# Allegro board hiveboard_v0_3.brd
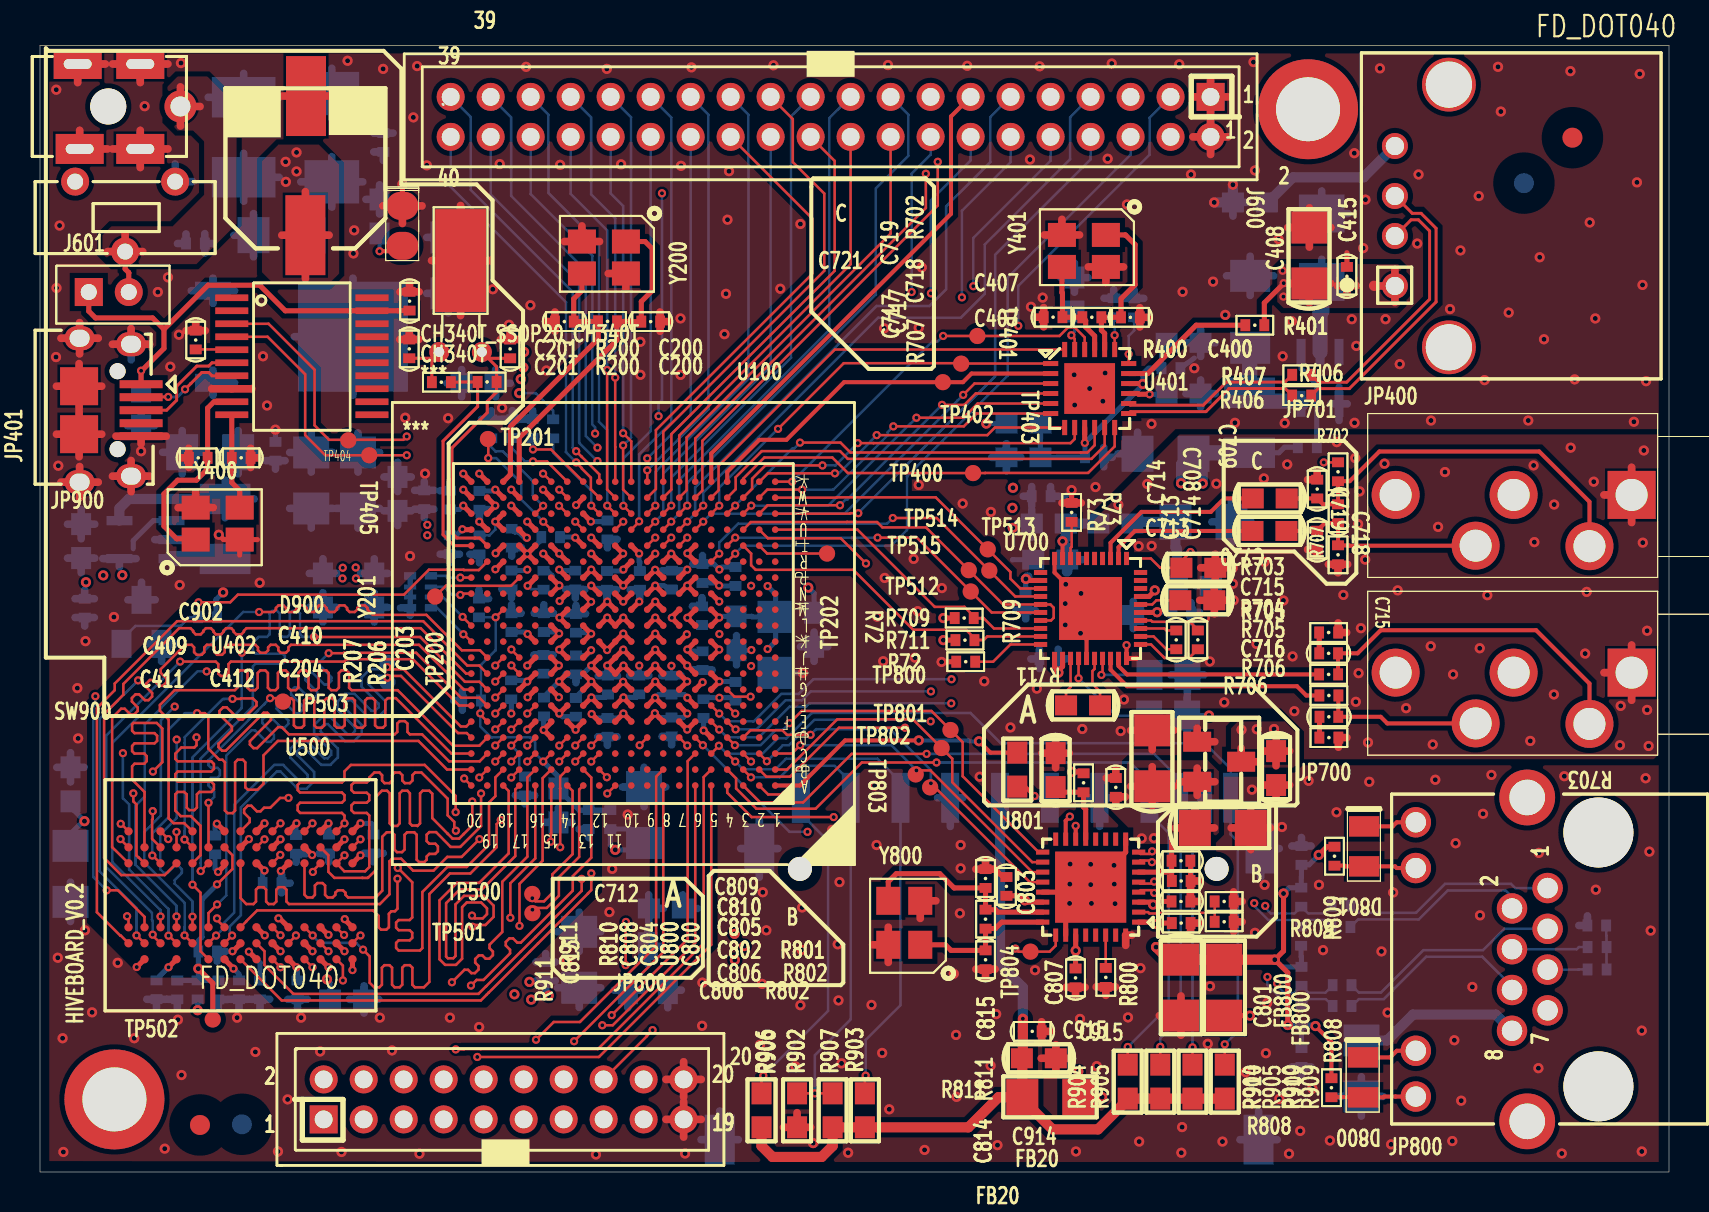
[diagram p0: board, top side]
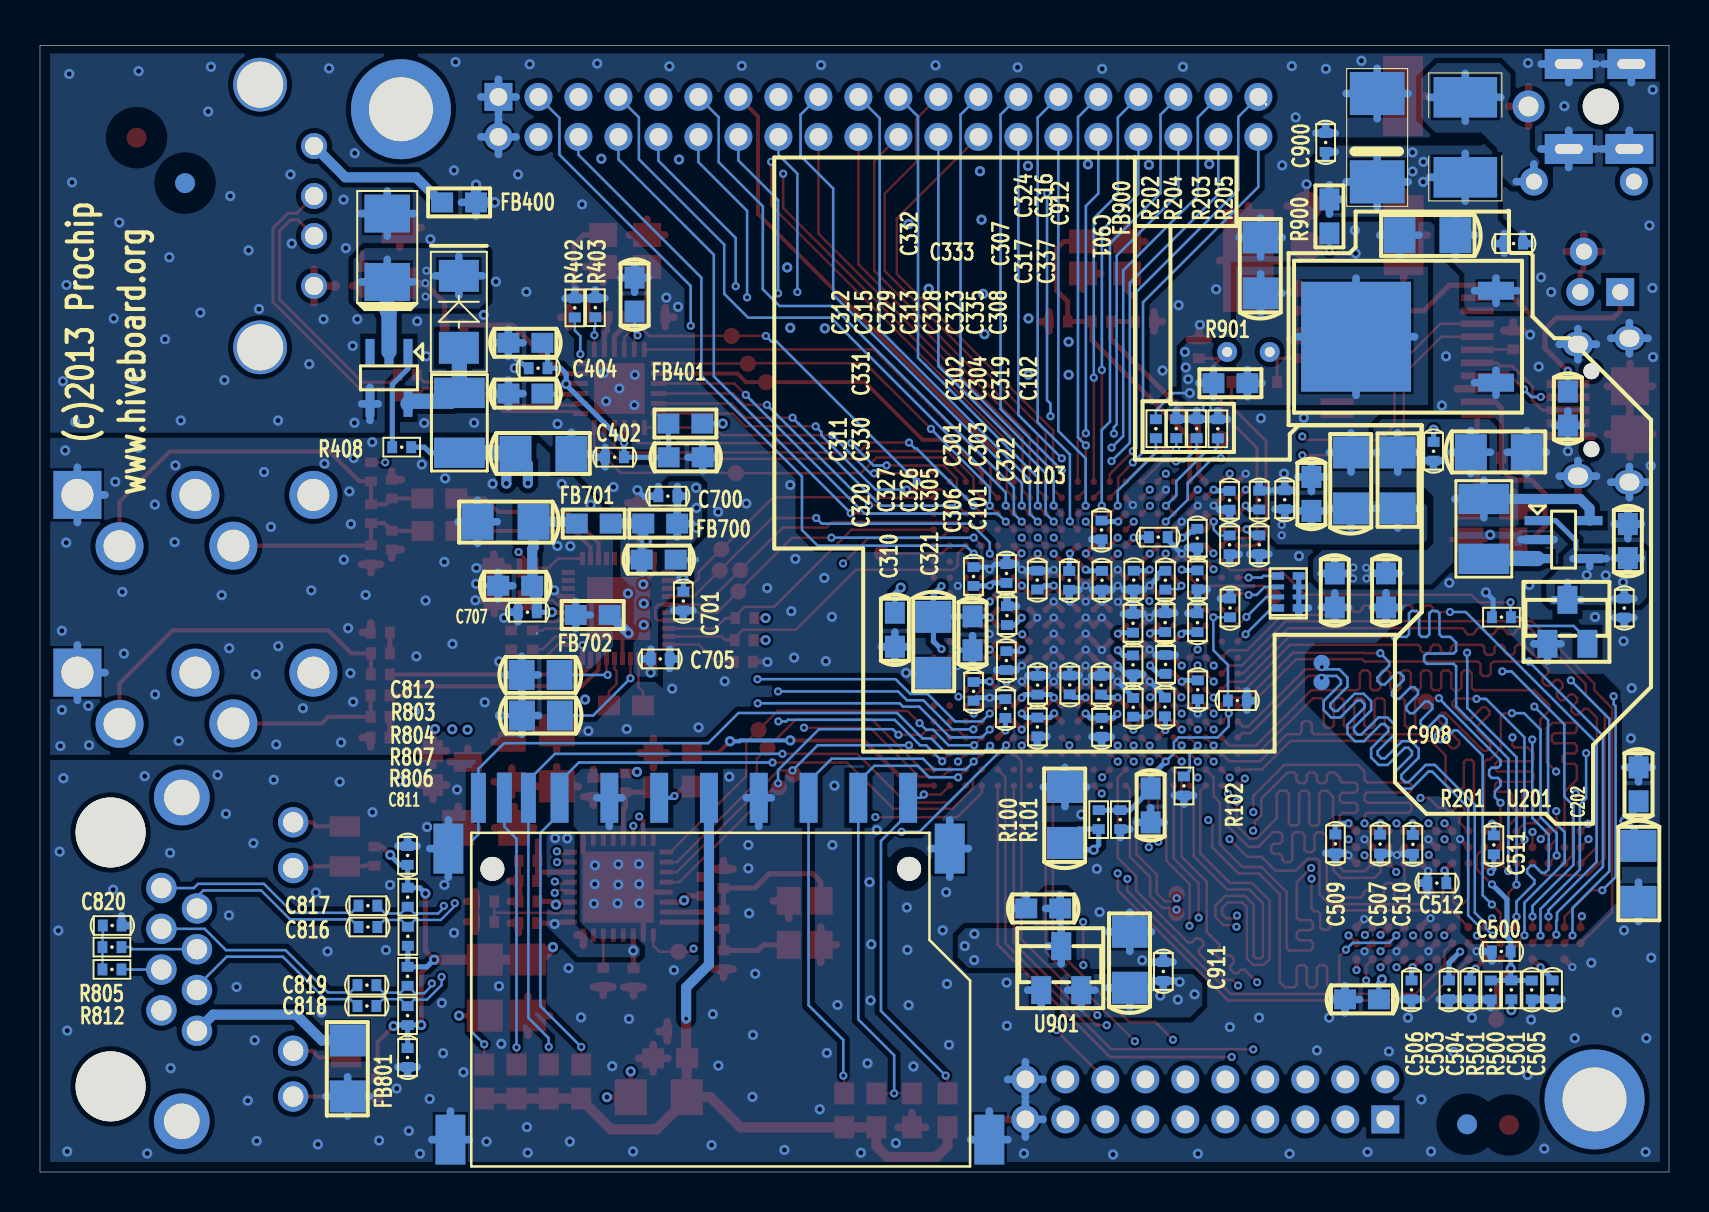
[diagram p1: board, bottom side, seen from below]

Outline 81.46 x 56.36 mm; copper layers: TOP, GND, INT1, VCC, GND1, BOTTOM. Coordinates in mm from the lower left corner of the outline.
Outline path: 20.17,53.39 20.14,53.42 ; 0,56.36 0,0 81.46,0 81.46,56.36 81.46,56.36 0,56.36

## Design rules (mm)
net group DP1: nets N27185592 N27185613
net group MATCH_LENTH_DQS0_DQS1: nets DDR_DQS1 DDR_DQS_B_1
net group USB: nets USB_DM USB_DP
net group MATCH_LENTH_ADD_ADD: nets DDR_BA0 DDR_BA1 DDR_BA2 DDR_CKE DDR_NCAS DDR_NCS DDR_NRAS DDR_NWE DDR_ODT T_DDR_A0 T_DDR_A1 T_DDR_A2 T_DDR_A3 T_DDR_A4 T_DDR_A5 T_DDR_A6 T_DDR_A7 T_DDR_A8 T_DDR_A9 T_DDR_A10 T_DDR_A11 T_DDR_A12 T_DDR_A13 T_DDR_A14
net group MATCH_LENTH_DQS0: nets DDR_CK DDR_NCK ETH_RXN ETH_RXN_RJ45 ETH_RXP ETH_RXP_RJ45 ETH_TXN ETH_TXN_RJ45 ETH_TXP ETH_TXP_RJ45
net group MATCH_LENTH_DQS0_DQS0: nets DDR_DM0 DDR_DQS0 DDR_DQS_B_0 T_DDR_DQ0 T_DDR_DQ1 T_DDR_DQ2 T_DDR_DQ3 T_DDR_DQ4 T_DDR_DQ5 T_DDR_DQ6 T_DDR_DQ7
net group MATCH_LENTH_DQS1_DQS1: nets DDR_DM1 T_DDR_DQ8 T_DDR_DQ9 T_DDR_DQ10 T_DDR_DQ11 T_DDR_DQ12 T_DDR_DQ13 T_DDR_DQ14 T_DDR_DQ15
nets with their own width: min track width 0.004; nets N27191334 N27191336

## Placement (name value [footprint] x y rotation side)
C100  1uF  [SC0603]  1.53 19.39 90 bottom
C101  0.1uF  [SC0402]  25.21 23.26 90 bottom
C102  0.1uF  [SC0402]  21.95 28.21 90 bottom
C103  0.01uF  [SC0402]  21.59 23.58 180 bottom
C104  1uF  [SC0603]  25.92 18.34 270 bottom
C200  20pF  [SC0402]  30.54 42.54 0 top
C201  20pF  [SC0402]  26.22 42.54 180 top
C202  0.1uF  [SC0402]  2.24 28.21 270 bottom
C203  15pF  [SC0402]  23.51 41.17 90 top
C204  15pF  [SC0402]  18.47 41.17 90 top
C300  10uF  [SC1206]  1.53 14.91 270 bottom
C301  0.1uF  [SC0402]  26.8 25.37 90 bottom
C302  0.1uF  [SC0402]  26.8 27.45 270 bottom
C303  0.1uF  [SC0402]  25.18 25.39 270 bottom
C304  0.1uF  [SC0402]  25.2 27.48 270 bottom
C305  0.01uF  [SC0402]  28.4 24.35 270 bottom
C306  0.01uF  [SC0402]  26.79 23.25 270 bottom
C307  0.01uF  [SC0402]  23.59 31.7 270 bottom
C308  0.1uF  [SC0402]  23.58 29.62 270 bottom
C309  1uF  [SC0603]  14.15 29.1 90 bottom
C310  0.1uF  [SC0402]  31.59 22.26 90 bottom
C311  0.1uF  [SC0402]  34.78 24.04 90 bottom
C312  0.1uF  [SC0402]  34.78 29.79 270 bottom
C313  0.01uF  [SC0402]  29.99 29.6 90 bottom
C314  10uF  [SC1206]  36.79 26.37 270 bottom
C315  0.01uF  [SC0402]  33.13 29.94 270 bottom
C316  0.01uF  [SC0402]  20.49 33.61 90 bottom
C317  0.01uF  [SC0402]  21.98 31.37 270 bottom
C318  1uF  [SC0603]  34.83 26.95 90 bottom
C319  0.1uF  [SC0402]  23.58 27.48 270 bottom
C320  0.1uF  [SC0402]  33.19 23.18 270 bottom
C321  0.01uF  [SC0402]  28.38 22.24 90 bottom
C322  0.01uF  [SC0402]  23.57 24.12 90 bottom
C323  0.1uF  [SC0402]  26.77 29.61 270 bottom
C324  0.1uF  [SC0402]  21.98 33.6 270 bottom
C325  1uF  [SC0603]  17.88 33.92 90 bottom
C326  0.1uF  [SC0402]  29.97 24.36 270 bottom
C327  0.1uF  [SC0402]  31.58 24.35 270 bottom
C328  0.1uF  [SC0402]  28.36 29.6 90 bottom
C329  0.1uF  [SC0402]  31.59 29.61 270 bottom
C330  0.01uF  [SC0402]  33.14 25.58 90 bottom
C331  0.01uF  [SC0402]  33.11 27.83 270 bottom
C332  0.1uF  [SC0402]  28.38 32.12 90 bottom
C333  0.1uF  [SC0402]  25.54 31.76 180 bottom
C334  1uF  [SC0603]  16.71 29.09 270 bottom
C335  0.1uF  [SC0402]  25.19 29.6 270 bottom
C336  1uF  [SC0603]  38.71 27.13 270 bottom
C337  0.1uF  [SC0402]  20.49 31.38 90 bottom
C400  20pF  [SC0402]  54.53 42.75 0 top
C401  1uF  [SC0603]  49.18 35.75 180 bottom
C402  0.1uF  [SC0402]  52.73 35.76 0 bottom
C403  4.7uF  [SC0603]  57.19 41.48 0 bottom
C404  0.1uF  [SC0402]  56.55 40.21 0 bottom
C405  1uF  [SC0603]  57.19 38.94 0 bottom
C406  1uF  [SC0603]  51.73 43.89 90 bottom
C407  20pF  [SC0402]  50.66 42.76 180 top
C408  22uF  [SC1206]  63.48 45.85 90 top
C409  0.01uF  [SC0402]  7.79 41.62 270 top
C410  0.1uF  [SC0402]  18.48 43.56 270 top
C411  22pF  [SC0402]  7.91 35.72 180 top
C412  22pF  [SC0402]  10.06 35.72 0 top
C413  22uF  [SC1206]  56.29 35.93 180 bottom
C414  100uF  [SC3528]  64.1 44.52 90 bottom
C415  0.1uF  [SC0402]  65.36 44.81 270 top
C416  4.7uF  [SC0603]  5.06 38.19 90 bottom
C500  0.1uF  [SC0402]  8.39 11.03 0 bottom
C501  0.01uF  [SC0402]  6.86 9.11 270 bottom
C502  10uF  [SC1206]  30.21 17.86 90 bottom
C503  0.1uF  [SC0402]  11 9.11 270 bottom
C504  0.1uF  [SC0402]  9.95 9.11 270 bottom
C505  0.1uF  [SC0402]  5.83 9.11 270 bottom
C506  0.01uF  [SC0402]  12.88 9.11 270 bottom
C507  0.01uF  [SC0402]  14.45 16.4 270 bottom
C508  1uF  [SC0603]  15.36 8.64 0 bottom
C509  0.1uF  [SC0402]  16.68 16.42 270 bottom
C510  0.1uF  [SC0402]  12.81 16.39 270 bottom
C511  0.01uF  [SC0402]  8.76 16.36 270 bottom
C512  0.01uF  [SC0402]  11.61 14.45 0 bottom
C700  0.1uF  [SC0402]  50.06 33.81 180 bottom
C701  0.1uF  [SC0402]  49.29 28.56 90 bottom
C702  10uF  [SC1206]  58.18 32.52 0 bottom
C704  4.7uF  [SC0603]  50.52 30.63 180 bottom
C705  0.1uF  [SC0402]  50.45 25.67 180 bottom
C706  4.7uF  [SC0603]  57.7 29.32 0 bottom
C707  0.1uF  [SC0402]  57.09 28 0 bottom
C708  4.7uF  [SC0603]  57.87 28.6 0 top
C709  4.7uF  [SC0603]  57.93 30.23 180 top
C710  10uF  [SC0805]  56.41 22.83 180 bottom
C711  10uF  [SC0805]  56.43 24.87 180 bottom
C712  1uF  [SC0603]  52.16 23.34 180 top
C713  0.47uF  [SC0402]  56.82 26.62 270 top
C714  0.47uF  [SC0402]  57.9 26.62 270 top
C715  22nF  [SC0402]  64.44 25.95 0 top
C716  22nF  [SC0402]  64.45 22.77 180 top
C717  33pF  [SC0402]  63.87 31.61 270 top
C718  33pF  [SC0402]  64.91 32.93 270 top
C719  33pF  [SC0402]  63.87 34.16 270 top
C720  1uF  [SC0603]  61.48 32.07 180 top
C721  1uF  [SC0603]  61.49 33.69 180 top
C800  4.7uF  [SC0603]  61.81 20.21 90 top
C801  10uF  [SC1206]  57.06 9.22 270 top
C802  0.1uF  [SC0402]  57.06 13.53 180 top
C803  0.01uF  [SC0402]  48.33 14.29 270 top
C804  10uF  [SC1206]  55.62 20.69 90 top
C805  0.1uF  [SC0402]  57.07 14.56 180 top
C806  0.1uF  [SC0402]  57.07 12.45 180 top
C807  0.1uF  [SC0402]  51.78 9.71 90 top
C808  0.01uF  [SC0402]  53.8 19.24 270 top
C809  10uF  [SC1206]  59.15 17.21 0 top
C810  0.1uF  [SC0402]  57.06 15.57 180 top
C811  0.1uF  [SC0402]  63.08 5.73 270 bottom
C812  0.1uF  [SC0402]  63.08 15.84 270 bottom
C813  1uF  [SC0603]  50.79 20.1 90 top
C814  10pF  [SC0402]  47.28 10.62 270 top
C815  10pF  [SC0402]  47.28 14.68 90 top
C816  0.1uF  [SC0402]  65.06 12.26 180 bottom
C817  0.1uF  [SC0402]  65.06 13.32 180 bottom
C818  0.1uF  [SC0402]  65.11 8.31 180 bottom
C819  0.1uF  [SC0402]  65.11 9.35 180 bottom
C820  0.1uF  [SC0402]  77.85 12.33 0 bottom
C900  0.1uF  [SC0402]  17.17 51.5 270 bottom
C901  0.01uF  [SC0402]  7.77 46.44 0 bottom
C902  220uF/16V  [CAP_SMD65X65]  13.27 48.21 90 top
C903  10uF  [SC1206]  12.08 46.86 0 bottom
C904  22uF  [SC1206]  20.42 45.35 90 bottom
C905  4.7uF  [SC0603]  31.29 13.18 180 bottom
C906  4.7uF  [SC0603]  2.06 31.56 270 bottom
C907  10uF  [SC1206]  8.51 36 180 bottom
C908  0.1uF  [SC0402]  11.77 36.06 270 bottom
C909  10uF  [SC1206]  15.9 34.59 90 bottom
C910  10uF  [SC1206]  26.96 10.62 90 bottom
C911  0.1uF  [SC0402]  25.29 10.03 270 bottom
C912  0.1uF  [SC0402]  19.22 33.63 270 bottom
C914  0.1uF  [SC0603]  49.95 5.69 0 top
C915  0.1uF  [SC0402]  49.62 7.04 180 top
D400  SK34  [SOD-80]  60.52 41.23 90 bottom
D800  LED  [SD0805]  66.16 3.73 270 top
D801  LED  [SD0805]  66.22 15.29 270 top
D900  LED  [LED-0805]  18.12 46.33 270 top
F900  (2A, SMD, Poly Switch)  [FUSE5X5]  10.19 53.76 270 bottom
FB20  BLM21PG300SN1  [SR1206]  50.52 3.75 0 top
FB400  BLM21PG300SN1  [SR0603]  60.5 48.5 0 bottom
FB401  BLM21PG300SN1  [SR0603]  49.19 37.44 180 bottom
FB700  MU3261_471Y  [SR0603]  50.45 32.44 0 bottom
FB701  MU3261_471Y  [SR0603]  53.77 32.44 0 bottom
FB702  MU3261_471Y  [SR0603]  53.82 27.86 180 bottom
FB800  BLM21PG300SN1  [SR1206]  59.22 9.22 270 top
FB801  BLM21PG300SN1  500mA/0.1DCR  [SR1206]  66.08 5.18 90 bottom
FB900  BLM21PG300SN1  [SR1206]  13.56 34.59 270 bottom
FD503  FD_DOT040  [MARK]  10.1 2.39 180 bottom
FD700  FD_DOT040  [MARK]  74.21 49.47 180 bottom
FD701  FD_DOT040  [MARK]  76.63 51.74 0 top
FD702  FD_DOT040  [MARK]  8 2.35 0 top
J600  HEADER2X20_200  [HD2X20_200]  39.54 52.78 180 top
J601  JUMPER  [SIP2_200]  2.44 44.02 0 top
JP400  USB TYPE A  [A_CN8-USB_A]  67.76 44.32 90 top
JP401  USB_MICRO_UMB05H239  [USB_UMB05H239]  5.06 39.41 90 top
JP600  HEADER2X10_200  [HD2X10_200]  33.19 3.63 0 top
JP700  PHONOJACK STEREO_15 GREEN  [EARJACK]  79.59 24.98 0 top
JP701  PHONOJACK STEREO_15 RED  [EARJACK]  79.59 33.87 0 top
JP800  ETH_KALER_RJ45J  [RJ45J]  75.39 14.2 90 top
JP900  DC530B  [DCJACK_DC530B]  7.02 53.3 0 top
JP901  SD_HALF  [SD_CARD]  40.54 18.72 0 bottom
L400  2.2uH(LQH32CN2R2M33)  [SR1210]  60.49 37.48 90 bottom
L900  2.2uH(LQH32CN2R2M33)  [SR1210]  9.26 32.17 90 bottom
NOREF  -  [unnamed]  63.41 53.16 0 top
NOREF#2  -  [unnamed]  3.72 3.63 0 top
R72  10K  [SR0402]  46.29 25.53 180 top
R73  10K  [SR0402]  51.59 32.99 270 top
R100  100K/1%  [SR0402]  28.52 17.63 270 bottom
R101  100K/1%  [SR0402]  27.44 17.63 90 bottom
R102  240R 1%  [SR0402]  24.26 19.31 90 bottom
R200  1M  [SR0402]  28.38 42.55 180 top
R201  100K  [SR0402]  8.38 27.75 0 bottom
R202  10K  [SR0402]  25.66 37.18 90 bottom
R203  10K  [SR0402]  23.62 37.19 270 bottom
R204  10K  [SR0402]  24.64 37.19 90 bottom
R205  10K  [SR0402]  22.56 37.18 270 bottom
R206  1 M  [SR0402]  22.36 39.52 180 top
R207  10K  [SR0402]  20.07 39.51 180 top
R400  1M  [SR0402]  52.6 42.76 180 top
R401  820R  [SR0402]  60.75 42.36 0 top
R402  0R  [SR0402]  54.72 43.23 90 bottom
R403  8.06K/1%  [SR0402]  53.69 43.24 90 bottom
R406  22R  [SR0402]  63.09 38.84 0 top
R407  22R  [SR0402]  63.09 39.88 0 top
R408  10K  [SR0402]  63.37 36.26 0 bottom
R500  100K/1%  [SR0402]  7.88 9.11 270 bottom
R501  100K/1%  [SR0402]  8.92 9.11 90 bottom
R702  2.2K  [SR0402]  64.91 35.03 90 top
R703  49R  [SR0402]  64.44 26.99 180 top
R704  0  [SR0402]  64.44 24.89 0 top
R705  0  [SR0402]  64.45 23.84 0 top
R706  49R  [SR0402]  64.45 21.73 0 top
R707  0R  [SR0402]  64.91 30.87 90 top
R709  10K  [SR0402]  46.22 27.71 180 top
R711  10K  [SR0402]  46.25 26.61 180 top
R800  100K  [SR0402]  53.3 9.74 90 top
R801  24.3K  1%  [SR0402]  59.22 13.53 180 top
R802  24.9K  1%  [SR0402]  59.22 12.52 180 top
R803  25R  [SR0402]  63.07 13.75 270 bottom
R804  25R  [SR0402]  63.06 11.79 90 bottom
R805  75R  [SR0402]  77.86 11.25 0 bottom
R806  25R  [SR0402]  63.08 7.82 270 bottom
R807  25R  [SR0402]  63.08 9.79 90 bottom
R808  330R  [SR0402]  64.58 4.22 90 top
R809  330R  [SR0402]  64.73 15.8 90 top
R810  10K  [SR0402]  52.19 19.47 270 top
R811  10K  [SR0402]  47.28 12.65 270 top
R812  75R  [SR0402]  77.86 10.13 0 bottom
R900  1K  [SR0603]  16.98 47.8 270 bottom
R901  0R  [SR0603]  21.93 39.46 180 bottom
R902  470K  [SR0603]  37.86 3.09 270 top
R903  4.7K  [SR0603]  41.25 3.09 270 top
R904  100K  [SR0603]  54.4 4.52 270 top
R905  100K  [SR0603]  56.02 4.52 270 top
R906  100K  [SR0603]  36.08 3.09 270 top
R907  100K  NC  [SR0603]  39.64 3.09 270 top
R909  100K  [SR0603]  59.25 4.52 270 top
R910  100K  [SR0603]  57.63 4.52 270 top
R911  22R  [SR0603]  48.87 20.13 270 top
RN100  10Kx4  [SRN8]  19.03 29.02 90 bottom
SW900  SW SPDT  [SW3_DIP]  6.76 49.54 180 top
TP200  TP_SS  [TP_08MM]  19.76 28.78 0 top
TP201  TP_SS  [TP_08MM]  22.4 36.67 0 top
TP202  TP_SS  [TP_08MM]  39.36 30.94 0 top
TP400  TP_SS  [TP_08MM]  46.66 34.96 0 top
TP401  TP_SS  [TP_08MM]  46.88 41.82 0 top
TP402  TP_SS  [TP_08MM]  45.15 39.51 0 top
TP403  TP_SS  [TP_08MM]  46.06 40.44 0 top
TP404  TP_SS  [TP_08MM]  15.42 36.6 0 top
TP405  TP_SS  [TP_08MM]  16.47 35.85 0 top
TP500  TP_SS  [TP_08MM]  24.62 13.91 0 top
TP501  TP_SS  [TP_08MM]  24.63 12.95 0 top
TP502  TP_SS  [TP_08MM]  8.64 7.63 0 top
TP503  TP_SS  [TP_08MM]  12.15 23.53 0 top
TP504  TP_SS  [TP_08MM]  17.37 25.47 180 bottom
TP505  TP_SS  [TP_08MM]  17.37 24.51 180 bottom
TP512  TP_SS  [TP_08MM]  46.54 29.04 0 top
TP513  TP_SS  [TP_08MM]  47.39 31.15 0 top
TP514  TP_SS  [TP_08MM]  47.47 30.09 0 top
TP515  TP_SS  [TP_08MM]  46.44 30.11 0 top
TP800  TP_SS  [TP_08MM]  45.53 22.11 0 top
TP801  TP_SS  [TP_08MM]  45.09 21.21 0 top
TP802  TP_SS  [TP_08MM]  43.79 19.89 0 top
TP803  TP_SS  [TP_08MM]  44.51 19.24 0 top
TP804  TP_SS  [TP_08MM]  49.53 11.02 0 top
U100  SEP6200  [BGA400-080_1700X1700]  29.17 26.93 180 top
U201  CAT809_EUR-R  [SOT23]  5.08 27.52 180 bottom
U400  BL8530-502RN  [SOT23_5]  64.01 39.73 270 bottom
U401  USB3343-CP-TR  [QFN24]  52.49 39.19 0 top
U402  CH340T  [SSOP20]  13.09 40.8 0 top
U500  HY5PS1G1631C  [A_FBGA84_E]  15.63 17.04 180 top
U700  CS3700  [QFN40_5X5]  52.54 28.19 270 top
U800  BL8552CB3TR12/AME8822AEEV120Z  [SOT23]  58.97 20.52 270 top
U801  AW6688  [QFN32]  52.54 14.25 180 top
U900  BL1085-33CY  [TO_252]  8.65 39.48 90 bottom
U901  BL8552CB3TR18/AME8822AEEV180Z  [SOT23]  30.39 10.2 180 bottom
U902  RT8008-12PB  [SOT23_5]  5.27 31.63 180 bottom
Y200  HCX-3SB_12Mhz  [SX4_32X25]  29.3 46.55 180 top
Y201  32.768K  [XTAL3_213]  19.97 41.02 90 top
Y400  HCX-3SB_12Mhz  [SX4_32X25]  7.79 31.64 0 top
Y401  HCX-3SB_26Mhz  [SX4_32X25]  53.3 46.88 180 top
Y800  HCX-3SB_25Mhz  [SX4_32X25]  44.02 11.37 90 top
ZD900  1SMB5920BT3G  [SMB403A]  14.59 53.95 270 bottom

## Library data of the parts
C100-C104 C200 C201 C301-C313 C315-C337 C411 C412 C500 C501 C503-C512 = CAP NP_0
C202-C204 C401-C406 C409 C410 C415 C416 C700 C701 C704-C721 C800 C802 C803 C805-C808 C810-C820 C900 C901 C905 C906 C908 C911 C912 C915 = CAP NP
C300 C314 C408 C413 C414 C502 C702 C801 C804 C809 C902-C904 C907 C909 C910 = CAP POL
C400 C407 = CAPACITOR NON-POL
C914 = CAPNP
D400 = DIODE SCHOTTKY
D800 D801 D900 = LED
F900 = FUSE
FB20 FB400 FB401 FB700-FB702 FB800 FB801 FB900 = FB
FD503 FD700-FD702 = FD_DOT040
J600 = CON40A
J601 = JUMPER
JP400 = USB TYPE A
JP401 = USB_MICRO_UMB05H239_0
JP600 = HEADER 10X2
JP700 JP701 = PHONOJACK STEREO_15
JP800 = ETH_KALER_RJ45J
JP900 = DC530B
JP901 = SD_HALF
L400 L900 = INDUCTOR
R72 R73 R201 R206 R207 R400-R403 R406-R408 R702-R707 R709 R711 R900 R902-R907 R909-R911 = R
R100-R102 R200 R202-R205 R500 R501 R800-R812 R901 = R_0
RN100 = RESAR_IS_4_SM
SW900 = SW SPDT
TP200-TP202 TP400-TP405 TP500-TP505 TP512-TP515 TP800-TP804 = TP_SS
U100 = SEP0611
U201 = CAT809
U400 = BL8530C
U401 = USB3343
U402 = CH340T: Tolerance: ***; User Part Number: ***
U500 = MT47H128M16_0
U700 = CS3700_0
U800 U900 U901 = BL1085
U801 = AW6688
U902 = LTC3406_V
Y200 Y400 Y401 Y800 = CRYSTAL_1
Y201 = CRYSTAL_0
ZD900 = ZD

## Footprints (pads in the part's own frame, mm; a bottom-side part is the same pattern mirrored in y, then rotated)
A_CN8-USB_A
  round 2.69 hole 2.31: (-3.07,-2.7) (10.07,-2.7)
  round 1.3 hole 0.91: 1(0,0) 2(2.5,0) 3(4.5,0) 4(7,0)
A_FBGA84_E
  round 0.41 smd: A1(0,0) A2(0,0.8) A3(0,1.6) A7(0,4.8) A8(0,5.6) A9(0,6.4) B1(0.8,0) B2(0.8,0.8) B3(0.8,1.6) B7(0.8,4.8) B8(0.8,5.6) B9(0.8,6.4) C1(1.6,0) C2(1.6,0.8) C3(1.6,1.6) C7(1.6,4.8) C8(1.6,5.6) C9(1.6,6.4) D1(2.4,0) D2(2.4,0.8) D3(2.4,1.6) D7(2.4,4.8) D8(2.4,5.6) D9(2.4,6.4) E1(3.2,0) E2(3.2,0.8) E3(3.2,1.6) E7(3.2,4.8) E8(3.2,5.6) E9(3.2,6.4) F1(4,0) F2(4,0.8) F3(4,1.6) F7(4,4.8) F8(4,5.6) F9(4,6.4) G1(4.8,0) G2(4.8,0.8) G3(4.8,1.6) G7(4.8,4.8) G8(4.8,5.6) G9(4.8,6.4) H1(5.6,0) H2(5.6,0.8) H3(5.6,1.6) H7(5.6,4.8) H8(5.6,5.6) H9(5.6,6.4) J1(6.4,0) J2(6.4,0.8) J3(6.4,1.6) J7(6.4,4.8) J8(6.4,5.6) J9(6.4,6.4) K2(7.2,0.8) K3(7.2,1.6) K7(7.2,4.8) K8(7.2,5.6) K9(7.2,6.4) L1(8,0) L2(8,0.8) L3(8,1.6) L7(8,4.8) L8(8,5.6) M2(8.8,0.8) M3(8.8,1.6) M7(8.8,4.8) M8(8.8,5.6) M9(8.8,6.4) N1(9.6,0) N2(9.6,0.8) N3(9.6,1.6) N7(9.6,4.8) N8(9.6,5.6) P2(10.4,0.8) P3(10.4,1.6) P7(10.4,4.8) P8(10.4,5.6) P9(10.4,6.4) R1(11.2,0) R2(11.2,0.8) R3(11.2,1.6) R7(11.2,4.8) R8(11.2,5.6)
BGA400-080_1700X1700
  round 0.33 smd: A1(-7.6,7.6) A2(-6.8,7.6) A3(-6,7.6) A4(-5.2,7.6) A5(-4.4,7.6) A6(-3.6,7.6) A7(-2.8,7.6) A8(-2,7.6) A9(-1.2,7.6) A10(-0.4,7.6) A11(0.4,7.6) A12(1.2,7.6) A13(2,7.6) A14(2.8,7.6) A15(3.6,7.6) A16(4.4,7.6) A17(5.2,7.6) A18(6,7.6) A19(6.8,7.6) A20(7.6,7.6) B1(-7.6,6.8) B2(-6.8,6.8) B3(-6,6.8) B4(-5.2,6.8) B5(-4.4,6.8) B6(-3.6,6.8) B7(-2.8,6.8) B8(-2,6.8) B9(-1.2,6.8) B10(-0.4,6.8) B11(0.4,6.8) B12(1.2,6.8) B13(2,6.8) B14(2.8,6.8) B15(3.6,6.8) B16(4.4,6.8) B17(5.2,6.8) B18(6,6.8) B19(6.8,6.8) B20(7.6,6.8) C1(-7.6,6) C2(-6.8,6) C3(-6,6) C4(-5.2,6) C5(-4.4,6) C6(-3.6,6) C7(-2.8,6) C8(-2,6) C9(-1.2,6) C10(-0.4,6) C11(0.4,6) C12(1.2,6) C13(2,6) C14(2.8,6) C15(3.6,6) C16(4.4,6) C17(5.2,6) C18(6,6) C19(6.8,6) C20(7.6,6) D1(-7.6,5.2) D2(-6.8,5.2) D3(-6,5.2) D4(-5.2,5.2) D5(-4.4,5.2) D6(-3.6,5.2) D7(-2.8,5.2) D8(-2,5.2) D9(-1.2,5.2) D10(-0.4,5.2) D11(0.4,5.2) D12(1.2,5.2) D13(2,5.2) D14(2.8,5.2) D15(3.6,5.2) D16(4.4,5.2) D17(5.2,5.2) D18(6,5.2) D19(6.8,5.2) D20(7.6,5.2) E1(-7.6,4.4) E2(-6.8,4.4) E3(-6,4.4) E4(-5.2,4.4) E5(-4.4,4.4) E6(-3.6,4.4) E7(-2.8,4.4) E8(-2,4.4) E9(-1.2,4.4) E10(-0.4,4.4) E11(0.4,4.4) E12(1.2,4.4) E13(2,4.4) E14(2.8,4.4) E15(3.6,4.4) E16(4.4,4.4) E17(5.2,4.4) E18(6,4.4) E19(6.8,4.4) E20(7.6,4.4) F1(-7.6,3.6) F2(-6.8,3.6) F3(-6,3.6) F4(-5.2,3.6) F5(-4.4,3.6) F6(-3.6,3.6) F7(-2.8,3.6) F8(-2,3.6) F9(-1.2,3.6) F10(-0.4,3.6) F11(0.4,3.6) F12(1.2,3.6) F13(2,3.6) F14(2.8,3.6) F15(3.6,3.6) F16(4.4,3.6) F17(5.2,3.6) F18(6,3.6) F19(6.8,3.6) F20(7.6,3.6) G1(-7.6,2.8) G2(-6.8,2.8) G3(-6,2.8) G4(-5.2,2.8) G5(-4.4,2.8) G6(-3.6,2.8) G7(-2.8,2.8) G8(-2,2.8) G9(-1.2,2.8) G10(-0.4,2.8) G11(0.4,2.8) G12(1.2,2.8) G13(2,2.8) G14(2.8,2.8) G15(3.6,2.8) G16(4.4,2.8) G17(5.2,2.8) G18(6,2.8) G19(6.8,2.8) G20(7.6,2.8) H1(-7.6,2) H2(-6.8,2) H3(-6,2) H4(-5.2,2) H5(-4.4,2) H6(-3.6,2) H7(-2.8,2) H8(-2,2) H9(-1.2,2) H10(-0.4,2) H11(0.4,2) H12(1.2,2) H13(2,2) H14(2.8,2) H15(3.6,2) H16(4.4,2) H17(5.2,2) H18(6,2) H19(6.8,2) H20(7.6,2) J1(-7.6,1.2) J2(-6.8,1.2) J3(-6,1.2) J4(-5.2,1.2) J5(-4.4,1.2) J6(-3.6,1.2) J7(-2.8,1.2) J8(-2,1.2) J9(-1.2,1.2) J10(-0.4,1.2) J11(0.4,1.2) J12(1.2,1.2) J13(2,1.2) J14(2.8,1.2) J15(3.6,1.2) J16(4.4,1.2) J17(5.2,1.2) J18(6,1.2) J19(6.8,1.2) J20(7.6,1.2) K1(-7.6,0.4) K2(-6.8,0.4) K3(-6,0.4) K4(-5.2,0.4) K5(-4.4,0.4) K6(-3.6,0.4) K7(-2.8,0.4) K8(-2,0.4) K9(-1.2,0.4) K10(-0.4,0.4) K11(0.4,0.4) K12(1.2,0.4) K13(2,0.4) K14(2.8,0.4) K15(3.6,0.4) K16(4.4,0.4) K17(5.2,0.4) K18(6,0.4) K19(6.8,0.4) K20(7.6,0.4) L1(-7.6,-0.4) L2(-6.8,-0.4) L3(-6,-0.4) L4(-5.2,-0.4) L5(-4.4,-0.4) L6(-3.6,-0.4) L7(-2.8,-0.4) L8(-2,-0.4) L9(-1.2,-0.4) L10(-0.4,-0.4) L11(0.4,-0.4) L12(1.2,-0.4) L13(2,-0.4) L14(2.8,-0.4) L15(3.6,-0.4) L16(4.4,-0.4) L17(5.2,-0.4) L18(6,-0.4) L19(6.8,-0.4) L20(7.6,-0.4) M1(-7.6,-1.2) M2(-6.8,-1.2) M3(-6,-1.2) M4(-5.2,-1.2) M5(-4.4,-1.2) M6(-3.6,-1.2) M7(-2.8,-1.2) M8(-2,-1.2) M9(-1.2,-1.2) M10(-0.4,-1.2) M11(0.4,-1.2) M12(1.2,-1.2) M13(2,-1.2) M14(2.8,-1.2) M15(3.6,-1.2) M16(4.4,-1.2) M17(5.2,-1.2) M18(6,-1.2) M19(6.8,-1.2) M20(7.6,-1.2) N1(-7.6,-2) N2(-6.8,-2) N3(-6,-2) N4(-5.2,-2) N5(-4.4,-2) N6(-3.6,-2) N7(-2.8,-2) N8(-2,-2) N9(-1.2,-2) N10(-0.4,-2) N11(0.4,-2) N12(1.2,-2) N13(2,-2) N14(2.8,-2) N15(3.6,-2) N16(4.4,-2) N17(5.2,-2) N18(6,-2) N19(6.8,-2) N20(7.6,-2) P1(-7.6,-2.8) P2(-6.8,-2.8) P3(-6,-2.8) P4(-5.2,-2.8) P5(-4.4,-2.8) P6(-3.6,-2.8) P7(-2.8,-2.8) P8(-2,-2.8) P9(-1.2,-2.8) P10(-0.4,-2.8) P11(0.4,-2.8) P12(1.2,-2.8) P13(2,-2.8) P14(2.8,-2.8) P15(3.6,-2.8) P16(4.4,-2.8) P17(5.2,-2.8) P18(6,-2.8) P19(6.8,-2.8) P20(7.6,-2.8) R1(-7.6,-3.6) R2(-6.8,-3.6) R3(-6,-3.6) R4(-5.2,-3.6) R5(-4.4,-3.6) R6(-3.6,-3.6) R7(-2.8,-3.6) R8(-2,-3.6) R9(-1.2,-3.6) R10(-0.4,-3.6) R11(0.4,-3.6) R12(1.2,-3.6) R13(2,-3.6) R14(2.8,-3.6) R15(3.6,-3.6) R16(4.4,-3.6) R17(5.2,-3.6) R18(6,-3.6) R19(6.8,-3.6) R20(7.6,-3.6) T1(-7.6,-4.4) T2(-6.8,-4.4) T3(-6,-4.4) T4(-5.2,-4.4) T5(-4.4,-4.4) T6(-3.6,-4.4) T7(-2.8,-4.4) T8(-2,-4.4) T9(-1.2,-4.4) T10(-0.4,-4.4) T11(0.4,-4.4) T12(1.2,-4.4) T13(2,-4.4) T14(2.8,-4.4) T15(3.6,-4.4) T16(4.4,-4.4) T17(5.2,-4.4) T18(6,-4.4) T19(6.8,-4.4) T20(7.6,-4.4) U1(-7.6,-5.2) U2(-6.8,-5.2) U3(-6,-5.2) U4(-5.2,-5.2) U5(-4.4,-5.2) U6(-3.6,-5.2) U7(-2.8,-5.2) U8(-2,-5.2) U9(-1.2,-5.2) U10(-0.4,-5.2) U11(0.4,-5.2) U12(1.2,-5.2) U13(2,-5.2) U14(2.8,-5.2) U15(3.6,-5.2) U16(4.4,-5.2) U17(5.2,-5.2) U18(6,-5.2) U19(6.8,-5.2) U20(7.6,-5.2) V1(-7.6,-6) V2(-6.8,-6) V3(-6,-6) V4(-5.2,-6) V5(-4.4,-6) V6(-3.6,-6) V7(-2.8,-6) V8(-2,-6) V9(-1.2,-6) V10(-0.4,-6) V11(0.4,-6) V12(1.2,-6) V13(2,-6) V14(2.8,-6) V15(3.6,-6) V16(4.4,-6) V17(5.2,-6) V18(6,-6) V19(6.8,-6) V20(7.6,-6) W1(-7.6,-6.8) W2(-6.8,-6.8) W3(-6,-6.8) W4(-5.2,-6.8) W5(-4.4,-6.8) W6(-3.6,-6.8) W7(-2.8,-6.8) W8(-2,-6.8) W9(-1.2,-6.8) W10(-0.4,-6.8) W11(0.4,-6.8) W12(1.2,-6.8) W13(2,-6.8) W14(2.8,-6.8) W15(3.6,-6.8) W16(4.4,-6.8) W17(5.2,-6.8) W18(6,-6.8) W19(6.8,-6.8) W20(7.6,-6.8) Y1(-7.6,-7.6) Y2(-6.8,-7.6) Y3(-6,-7.6) Y4(-5.2,-7.6) Y5(-4.4,-7.6) Y6(-3.6,-7.6) Y7(-2.8,-7.6) Y8(-2,-7.6) Y9(-1.2,-7.6) Y10(-0.4,-7.6) Y11(0.4,-7.6) Y12(1.2,-7.6) Y13(2,-7.6) Y14(2.8,-7.6) Y15(3.6,-7.6) Y16(4.4,-7.6) Y17(5.2,-7.6) Y18(6,-7.6) Y19(6.8,-7.6) Y20(7.6,-7.6)
CAP_SMD65X65
  rect 4x2 smd: 1(-1.35,0) 2(5.61,-0.03)
DCJACK_DC530B
  round 1.8 hole 1.8 unplated: (-3.61,0)
  round 1.6 hole 1: 1(0,0)
  rect 2.4x1.5 hole 1.4x0.5: 2(-2.01,2.125) 3(-2.01,-2.125) 4(-5.14,2.125) 5(-5.04,-2.125)
EARJACK
  rect 2.4x2.4 hole 1.6: 1(0,0)
  round 2.4 hole 1.6: 2(-5.9,0) 3(-11.801,0) 4(-7.8,-2.54) 5(-2.108,-2.565)
FUSE5X5
  rect 2.03x3.18 smd: 1(0,0) 2(4,0)
HD2X10_200
  rect 1.4x1.4 hole 0.89: 1(-19,-1)
  round 1.4 hole 0.89: 2(-19,1) 3(-17,-1) 4(-17,1) 5(-15,-1) 6(-15,1) 7(-13,-1) 8(-13,1) 9(-11,-1) 10(-11,1) 11(-9,-1) 12(-9,1) 13(-7,-1) 14(-7,1) 15(-5,-1) 16(-5,1) 17(-3,-1) 18(-3,1) 19(-1,-1) 20(-1,1)
HD2X20_200
  rect 1.4x1.4 hole 0.89: 1(-19,-1)
  round 1.4 hole 0.89: 2(-19,1) 3(-17,-1) 4(-17,1) 5(-15,-1) 6(-15,1) 7(-13,-1) 8(-13,1) 9(-11,-1) 10(-11,1) 11(-9,-1) 12(-9,1) 13(-7,-1) 14(-7,1) 15(-5,-1) 16(-5,1) 17(-3,-1) 18(-3,1) 19(-1,-1) 20(-1,1) 21(1,-1) 22(1,1) 23(3,-1) 24(3,1) 25(5,-1) 26(5,1) 27(7,-1) 28(7,1) 29(9,-1) 30(9,1) 31(11,-1) 32(11,1) 33(13,-1) 34(13,1) 35(15,-1) 36(15,1) 37(17,-1) 38(17,1) 39(19,-1) 40(19,1)
LED-0805
  custom 1.4x1.6 smd: 1(0,0) 2(-1.999,0)
MARK
  round 1 smd: 1(0,0)
QFN24
  rect 0.76x0.25 smd: 1(-1.951,1.25) 2(-1.951,0.749) 3(-1.951,0.249) 4(-1.951,-0.249) 5(-1.951,-0.749) 6(-1.951,-1.25) 13(1.951,-1.25) 14(1.951,-0.749) 15(1.951,-0.249) 16(1.951,0.249) 17(1.951,0.749) 18(1.951,1.25)
  rect 0.25x0.76 smd: 7(-1.25,-1.951) 8(-0.749,-1.951) 9(-0.249,-1.951) 10(0.249,-1.951) 11(0.749,-1.951) 12(1.25,-1.951) 19(1.25,1.951) 20(0.749,1.951) 21(0.249,1.951) 22(-0.249,1.951) 23(-0.749,1.951) 24(-1.25,1.951)
  rect 2.54x2.54 smd: 25(0,0)
QFN32
  rect 0.66x0.25 smd: 1(-2.4,1.75) 2(-2.4,1.25) 3(-2.4,0.75) 4(-2.4,0.25) 5(-2.4,-0.25) 6(-2.4,-0.75) 7(-2.4,-1.25) 8(-2.4,-1.75) 17(2.4,-1.75) 18(2.4,-1.25) 19(2.4,-0.75) 20(2.4,-0.25) 21(2.4,0.25) 22(2.4,0.75) 23(2.4,1.25) 24(2.4,1.75)
  rect 0.25x0.66 smd: 9(-1.75,-2.4) 10(-1.25,-2.4) 11(-0.75,-2.4) 12(-0.25,-2.4) 13(0.25,-2.4) 14(0.75,-2.4) 15(1.25,-2.4) 16(1.75,-2.4) 25(1.75,2.4) 26(1.25,2.4) 27(0.75,2.4) 28(0.25,2.4) 29(-0.25,2.4) 30(-0.75,2.4) 31(-1.25,2.4) 32(-1.75,2.4)
  rect 3.56x3.56 smd: 33(0,0)
QFN40_5X5
  rect 0.66x0.25 smd: 1(-2.5,1.8) 2(-2.5,1.4) 3(-2.5,1) 4(-2.5,0.6) 5(-2.5,0.2) 6(-2.5,-0.2) 7(-2.5,-0.6) 8(-2.5,-1) 9(-2.5,-1.4) 10(-2.5,-1.8) 21(2.5,-1.8) 22(2.5,-1.4) 23(2.5,-1) 24(2.5,-0.6) 25(2.5,-0.2) 26(2.5,0.2) 27(2.5,0.6) 28(2.5,1) 29(2.5,1.4) 30(2.5,1.8)
  rect 0.25x0.66 smd: 11(-1.8,-2.5) 12(-1.4,-2.5) 13(-1,-2.5) 14(-0.6,-2.5) 15(-0.2,-2.5) 16(0.2,-2.5) 17(0.6,-2.5) 18(1,-2.5) 19(1.4,-2.5) 20(1.8,-2.5) 31(1.8,2.5) 32(1.4,2.5) 33(1,2.5) 34(0.6,2.5) 35(0.2,2.5) 36(-0.2,2.5) 37(-0.6,2.5) 38(-1,2.5) 39(-1.4,2.5) 40(-1.8,2.5)
  rect 3.15x3.15 smd: 41(0,0)
RJ45J
  round 3.5 hole 3.5 unplated: (-9.92,-2.54) (2.78,-2.54)
  round 1.52 hole 1.02: 1(0,0) 2(-1.02,1.78) 3(-2.04,0) 4(-3.06,1.78) 5(-4.08,0) 6(-5.1,1.78) 7(-6.12,0) 8(-7.14,1.78) 9(-10.43,6.59) 10(-8.14,6.59) 11(1,6.59) 12(3.29,6.59)
  round 2.79 hole 1.78: 15(-11.67,1.02) 16(4.53,1.02)
SC0402
  rect 0.49x0.6 smd: 1(-0.47,0) 2(0.47,0)
SC0603
  rect 1.1x1 smd: 1(-0.85,0) 2(0.85,0)
SC0805
  rect 1.3x1.5 smd: 1(-0.95,0) 2(0.95,0)
SC1206
  rect 1.6x1.8 smd: 1(-1.4,0) 2(1.4,0)
SC3528
  rect 1.9x2.28 smd: 1(0,0) 2(3.42,0)
SD0805
  rect 1.02x1.52 smd: 1(0,0) 2(-1.999,0)
SD_CARD
  round 1.2 hole 1.7 unplated: (-2.54,3.556)
  round 1.2 hole 1.2 unplated: (18.3,3.556)
  rect 0.9x2.5 smd: 1(0,0) 2(2.49,0) 3(4.98,0) 4(7.47,0) 5(9.96,0) 6(12.45,0) 7(14.94,0) 9(-2.49,0)
  rect 0.75x2.5 smd: 8(16.5,0) 10(17.7,0) 11(19,0)
  rect 1.5x2.5 smd: 12(20.5,2.54) 13(20.4,17.1) 14(-6.55,17.1) 15(-4.57,2.54)
SIP2_200
  rect 1.4x1.4 hole 0.8: 1(0,0)
  round 1.4 hole 0.8: 2(2,0)
SMB403A
  rect 2.16x2.74 smd: 1(0,0) 2(4.42,0)
SOD-80
  rect 1.6x2 smd: 1(0,0) 2(3.6,0)
SOT23
  rect 1x1.4 smd: 1(-1,-1.1) 2(1,-1.1) 3(0,1.1)
SOT23_5
  rect 1.3x0.46 smd: 1(-1.3,0.95) 2(-1.3,0) 3(-1.3,-0.95) 4(1.3,-0.95) 5(1.3,0.95)
SR0402
  rect 0.49x0.6 smd: 1(-0.475,0) 2(0.475,0)
SR0603
  rect 1.1x1 smd: 1(-0.85,0) 2(0.85,0)
SR1206
  rect 1.6x1.8 smd: 1(-1.4,0) 2(1.4,0)
SR1210
  rect 1.52x2.54 smd: 1(-1.499,0) 2(1.499,0)
SRN8
  rect 0.38x0.61 smd: 1(-0.8,-0.52) 4(0.8,-0.52) 5(0.8,0.52) 8(-0.8,0.52)
  rect 0.25x0.61 smd: 2(-0.25,-0.52) 3(0.25,-0.52) 6(0.25,0.52) 7(-0.25,0.52)
SSOP20
  rect 1.65x0.33 smd: 1(-3.505,2.926) 2(-3.505,2.276) 3(-3.505,1.626) 4(-3.505,0.975) 5(-3.505,0.325) 6(-3.505,-0.325) 7(-3.505,-0.975) 8(-3.505,-1.626) 9(-3.505,-2.276) 10(-3.505,-2.926) 11(3.505,-2.926) 12(3.505,-2.276) 13(3.505,-1.626) 14(3.505,-0.975) 15(3.505,-0.325) 16(3.505,0.325) 17(3.505,0.975) 18(3.505,1.626) 19(3.505,2.276) 20(3.505,2.926)
SW3_DIP
  round 1.4 hole 0.8: 1(0,0) 2(2.5,3.5) 3(5,0)
SX4_32X25
  rect 1.4x1.2 smd: 1(0,0) 2(2.2,0) 3(2.2,1.6) 4(0,1.6)
TO_252
  rect 0.9x1.8 smd: 1(0,0) 3(4.6,0)
  rect 5.5x5.5 smd: 2(2.3,7)
TP_08MM
  round 0.81 smd: 1(0,0)
unnamed
  round 5 hole 3.2: 1(0,0)
USB_UMB05H239
  round 0.8 hole 0.8 unplated: (-3.25,1.175) (0.65,1.175)
  rect 0.4x2.15 smd: 1(0,0) 2(-0.65,0) 3(-1.3,0) 4(-1.95,0) 5(-2.6,0)
  oval 1.2x1.5 hole 0.85x1: 6(2,0.5) 7(-4.6,0.5) 8(2.3,3.075) 9(-4.9,3.075)
  rect 1.9x1.9 smd: NC3(-2.5,3.1) NC4(-0.1,3.1)
XTAL3_213
  round 1 hole 0.5: 1(0,0) 2(0,-2.13)
  rect 5.15x2.54 smd: 3(4.572,-1.067)

## Nets
GND: C100.2 C101.2 C102.2 C103.2 C104.2 C200.2 C201.2 C202.2 C203.2 C204.2 C300.2 C301.1 C302.1 C303.1 C304.1 C305.1 C306.1 C307.2 C308.2 C309.1 C310.1 C311.1 C312.1 C313.1 C314.2 C315.1 C316.2 C317.2 C318.1 C319.1 C320.1 C321.1 C322.1 C323.2 C324.2 C325.2 C326.1 C327.1 C328.1 C329.1 C330.1 C331.1 C332.1 C333.2 C334.2 C335.1 C336.2 C337.1 C400.2 C401.2 C402.2 C403.2 C404.2 C405.2 C406.2 C407.2 C408.2 C409.1 C410.1 C411.2 C412.2 C413.2 C414.2 C415.1 C416.1 C500.2 C501.2 C502.2 C503.2 C504.2 C505.2 C506.2 C507.2 C508.2 C509.2 C510.2 C511.2 C512.2 C700.1 C701.1 C704.2 C705.2 C800.1 C801.2 C802.1 C803.1 C804.2 C805.1 C806.1 C807.1 C808.1 C809.2 C810.1 C811.2 C812.1 C813.2 C814.2 C815.2 C820.1 C900.1 C901.1 C902.2 C903.2 C904.2 C905.1 C906.1 C907.2 C908.1 C909.2 C910.2 C911.1 C912.1 C914.2 C915.1 D900.2(CATHODE) FB400.1 FB702.2 FB801.1 J600.1 J600.2 JP401.5(GND) JP401.6(SHIELD1) JP401.7(SHIELD2) JP401.8(SHIELD3) JP401.9(SHIELD4) JP401.NC3($PIN11) JP401.NC4($PIN12) JP600.19 JP600.20 JP900.2 JP900.3 JP900.4 JP900.5 JP901.3(VSS1) JP901.6(VSS2) JP901.12(M1) JP901.13(M2) JP901.14(M3) JP901.15(M4) R72.2 R73.1 R101.1 R102.1 R201.2 R203.1 R204.2 R205.1 R402.2 R403.2 R501.1 R800.1 R801.1 R802.1 R902.2 RN100.1(A1) RN100.2(A2) RN100.3(A3) RN100.4(A4) U100.G7(VSSPST#G7) U100.G8(VSS#G8) U100.G9(VSSPST#G9) U100.G10(VSSPST#G10) U100.G11(VSS#G11) U100.G12(VSSQ#G12) U100.G13(VSSQ#G13) U100.G14(VSSQ#G14) U100.H6(VSS#H6) U100.H7(VSS#H7) U100.H8(VSSPST#H8) U100.H9(VSS#H9) U100.H10(VSS#H10) U100.H11(VSS#H11) U100.H12(VSSQ#H12) U100.H13(VSSQ#H13) U100.H14(VSSQ#H14) U100.J7(VSSPST#J7) U100.J8(VSSPST#J8) U100.J9(VSS#J9) U100.J10(VSS#J10) U100.J11(VSS#J11) U100.J12(VSSQ#J12) U100.J14(VSSQ#J14) U100.K8(VSSPST#K8) U100.K9(VSS#K9) U100.K10(VSS#K10) U100.K11(VSS#K11) U100.K12(VSSQ#K12) U100.K14(VSSQ#K14) U100.L7(VSSPST#L7) U100.L8(VSSPST#L8) U100.L9(VSS#L9) U100.L10(VSS#L10) U100.L11(VSS#L11) U100.L12(VSSQ#L12) U100.L14(VSSQ#L14) U100.M7(VSSPST#M7) U100.M8(VSSPST#M8) U100.M9(VSSPST#M9) U100.M10(VSSPST#M10) U100.M11(VSS#M11) U100.M12(VSSQ#M12) U100.M13(VSSQ#M13) U100.M14(VSSQ#M14) U100.N10(VSSPST#N10) U100.N11(VSS#N11) U100.N12(VSS#N12) U100.N13(VSSQ#N13) U100.N15(VSS3_RTC) U100.P7(VSS#P7) U100.P8(VSS#P8) U100.P9(VSSPST#P9) U100.P10(VSS#P10) U100.P11(VSS#P11) U100.P12(VSS#P12) U100.P13(VSSQ#P13) U100.P15(CLK32K_AVSS) U100.R16(MPLL_VSS3) U100.R17(CLK32K_VSS3) U100.T16(DPLL_VSS3) U100.T17(MPLL_AVSS) U100.U16(APLL_DVSS) U100.U19(MPLL_DVSS) U100.V17(APLL_AVSS) U100.V19(DPLL_AVSS) U100.W13(VSSPST_PMU) U100.W15(VSS_PMU) U100.W19(DPLL_DVSS) U100.Y20(APLL_VSS3) U201.1(GND) U400.4(VSS) U401.25(GND) U402.8(GND) U500.A3(VSS#A3) U500.A7(VSSQ#A7) U500.B2(VSSQ#B2) U500.B8(VSSQ#B8) U500.D2(VSSQ#D2) U500.D8(VSSQ#D8) U500.E3(VSS#E3) U500.E7(VSSQ#E7) U500.F2(VSSQ#F2) U500.F8(VSSQ#F8) U500.H2(VSSQ#H2) U500.H8(VSSQ#H8) U500.J3(VSS#J3) U500.J7(VSSDL) U500.N1(VSS#N1) U500.P9(VSS#P9) U700.10(DGND) U700.25(CPGND) U700.41(PADGND) U800.1(GND) U801.9(GND12A) U801.21(VSSIO) U801.26(VSS) U801.32(GND12D) U801.33(GNDA) U900.1(GND) U901.1(GND) U902.2(GND) Y200.2 Y200.4 Y201.3 Y400.2 Y400.4 Y401.2 Y401.4 Y800.2 Y800.4 ZD900.1(ANODE)
GND_SIGNAL: C702.2 C706.2 C707.2 C708.2 C709.1 C710.1 C711.1 C717.2 C719.1 FB702.1 JP700.1 JP701.1 R703.1 R706.2 R707.1 U700.30(HPGND) U700.37(AGND)
VBUS_HOST: C408.1 C414.1 C415.2 D400.2(CATHODE) JP400.1(VBUS) R401.2 U400.2(VOUT)
VDD1.2V: C309.2 C310.2 C311.2 C312.2 C313.2 C314.1 C315.2 C318.2 C319.2 C320.2 C321.2 C322.2 C333.1 C334.1 C335.2 C907.1 C908.2 FB900.1 L900.2 U100.D5(VDD#D5) U100.E6(VDD#E6) U100.E7(VDD#E7) U100.E8(VDD#E8) U100.E9(VDD#E9) U100.E10(VDD#E10) U100.E11(VDD#E11) U100.E12(VDD#E12) U100.E13(VDD#E13) U100.E14(VDD#E14) U100.E16(VDD#E16) U100.F7(VDD#F7) U100.G5(VDD#G5) U100.G6(VDD#G6) U100.G17(VDD#G17) U100.H5(VDD#H5) U100.H16(VDD#H16) U100.J5(VDD#J5) U100.K5(VDD_ARM#K5) U100.K7(VDD#K7) U100.K16(VDD#K16) U100.L5(VDD_ARM#L5) U100.M5(VDD_ARM#M5) U100.N5(VDD_ARM#N5) U100.N6(VDD_ARM#N6) U100.N7(VDD_ARM#N7) U100.P5(VDD_ARM#P5) U100.P6(VDD_ARM#P6) U100.P16(CLK32K_AVDD) U100.R6(VDD_ARM#R6) U100.R7(VDD#R7) U100.R8(VDD#R8) U100.R18(VDD_RTC) U100.T6(VDD_ARM#T6) U100.T10(VDD#T10) U100.T13(VDD_PMU) U100.T18(CLK32K_VDD) U902.5(VOUT)
VDD3.3V: C202.1 C307.1 C308.1 C326.2 C327.2 C328.2 C329.2 C330.2 C331.2 C332.2 C336.1 C337.2 C700.2 C800.2 C905.2 C906.2 FB20.2 FB401.2 FB700.1 FB800.2 J600.15 JP600.1 JP600.3 R202.2 R709.2 R711.2 R901.1 U100.F6(VDDPST#F6) U100.F8(VDDPST#F8) U100.F9(VDDPST#F9) U100.F10(VDDPST#F10) U100.F11(VDDPST#F11) U100.J6(VDDPST#J6) U100.K6(VDDPST#K6) U100.L6(VDDPST#L6) U100.M6(VDDPST#M6) U100.N8(VDDPST#N8) U100.N9(VDDPST#N9) U100.N14(VDDPST_RTC) U100.R9(VDDPST#R9) U100.R10(VDDPST#R10) U100.R11(VDDPST#R11) U100.R15(MPLL_VDDPOC) U100.T11(VDDPST#T11) U100.U17(DPLL_VDDPOC) U100.U20(CLK32K_VDDPOC) U100.V13(VDDPST_PMU) U100.W17(APLL_VDDPOC) U201.3(VCC) U800.3(VIN) U901.3(VIN) U902.1(RUN) U902.4(VIN)
VDD5V: C413.1 C900.2 C901.2 C902.1 C903.1 F900.2 JP600.2 JP600.4 L400.1 R408.1 R900.1 U900.3(VIN) ZD900.2(CATHODE)
VDD_AUDIO: C701.2 C704.1 C705.1 FB700.2 FB701.1 U700.9(DIOVDD) U700.12(DCVDD) U700.21(CPVDDL) U700.22(CPVDDH)
VDD_DDR: C100.1 C101.1 C300.1 C301.2 C302.2 C303.2 C304.2 C305.2 C306.2 C502.1 C503.1 C504.1 C505.1 C506.1 C507.1 C508.1 C509.1 C510.1 C511.1 C512.1 C910.1 C911.2 R100.2 R500.2 U100.D15(VDDQ#D15) U100.E15(VDDQ#E15) U100.F12(VDDQ#F12) U100.F13(VDDQ#F13) U100.F14(VDDQ#F14) U100.F15(VDDQ#F15) U100.G15(VDDQ#G15) U100.G16(VDDQ#G16) U100.H15(VDDQ#H15) U100.J13(VDDQ#J13) U100.J15(VDDQ#J15) U100.J16(DDR/VDDQ_AON) U100.K13(VDDQ#K13) U100.K15(VDDQ#K15) U100.L13(VDDQ#L13) U100.L15(VDDQ#L15) U500.A1(VDD#A1) U500.A9(VDDQ#A9) U500.C1(VDDQ#C1) U500.C3(VDDQ#C3) U500.C7(VDDQ#C7) U500.C9(VDDQ#C9) U500.E1(VDD#E1) U500.E9(VDDQ#E9) U500.G1(VDDQ#G1) U500.G3(VDDQ#G3) U500.G7(VDDQ#G7) U500.G9(VDDQ#G9) U500.J1(VDDL) U500.J9(VDD#J9) U500.M9(VDD#M9) U500.R1(VDD#R1) U901.2(VOUT)
VDD_DDR_REF: C500.1 C501.1 R500.1 R501.2 TP502.1(TP) U500.J2(VREF)
VDD_ETH1.2V: C804.1 C805.2 C806.2 C807.2 C808.2 C809.1 C810.2 U800.2(VOUT) U801.1(VCC) U801.6(VCC12A) U801.27(VDD)
VDD_ETH3.3V: C801.1 C802.2 C803.2 C811.1 C812.2 FB800.1 R803.1 R804.1 R806.2 R807.2 R808.2 R809.2 R810.1 U801.3(VCC33A_BG) U801.22(VDDIO)
VDD_IN: J601.2 JP900.1 SW900.2(COMMON)
VDD_SD: C914.1 C915.2 FB20.1 JP901.4(VDD) R903.2 R904.2 R905.2 R906.2 R907.2 R909.2 R910.2
VDDA_AUDIO: C702.1 C706.1 C707.1 FB701.2 U700.35(AVDD)
VDDPLL1.2V: C316.1 C317.1 C323.1 C324.1 C325.1 C909.1 C912.2 FB900.2 U100.P14(MPLL_AVDD) U100.R14(APLL_AVDD) U100.T15(DPLL_VDD) U100.U18(MPLL_VDD) U100.V18(DPLL_AVDD) U100.V20(MPLL_DVDD) U100.W18(APLL_VDD) U100.W20(DPLL_DVDD) U100.Y19(APLL_DVDD)
25M_IN: C815.1 R811.1 U801.23(PAD_XTAL_P) Y800.3
25M_OUT: C814.1 R811.2 U801.24(PAD_XTAL_N) Y800.1
AP0_INT0: JP600.13 U100.Y15(AP0/INT0)
AP1_INT1: JP600.15 U100.V14(AP1/INT1)
AP2_INT2: JP600.17 U100.U13(AP2/INT2)
AP3_INT3: J600.4 U100.W14(AP3/INT3)
BTMD0: R204.1 U100.Y13(BOOTMODE0)
BTMD1: R203.2 U100.Y14(BOOTMODE1)
BTMD2: R202.1 U100.V12(BOOTMODE2)
CLK12M_XIN: C200.1 R200.1 U100.Y17(CLK12M_XIN) Y200.1
CLK12M_XOUT: C201.1 R200.2 U100.Y18(CLK12M_XOUT) Y200.3
CLK32K_XIN: C203.1 R206.1 U100.T19(CLK32K_XIN) Y201.2
CLK32K_XOUT: R206.2 R207.1 U100.T20(CLK32K_XOUT)
CPU_DDR_REF: C102.1 C103.1 C104.1 R100.1 R101.2 U100.C15(VREF0) U100.E19(VREF1) U100.M18(VREF2)
CTS4: JP600.12 U100.D9(PD0/URAT4_CTS)
DDR_BA0: U100.C19(DDR2_BA0) U500.L2(BA0)
DDR_BA1: U100.E17(DDR2_BA1) U500.L3(BA1)
DDR_BA2: U100.D19(DDR2_BA2) U500.L1(BA2)
DDR_CK: TP505.1(TP) U100.D20(DDR2_CK) U500.J8(CK)
DDR_CKE: TP503.1(TP) U100.C20(DDR2_CKE) U500.K2(CKE)
DDR_DM0: U100.B12(DDR2_DM0) U500.F3(LDM)
DDR_DM1: U100.D14(DDR2_DM1) U500.B3(UDM)
DDR_DQS0: TP500.1(TP) U100.A14(DDR2_DQS0) U500.F7(LDQS)
DDR_DQS1: U100.A18(DDR2_DQS1) U500.B7(UDQS)
DDR_DQS2: RN100.7(B2) U100.L20(DDR2_DQS2)
DDR_DQS3: RN100.5(B4) U100.P20(DDR2_DQS3)
DDR_DQS_B_0: TP501.1(TP) U100.A13(DDR2_DQS_B0) U500.E8(L\D\Q\S\/NU)
DDR_DQS_B_1: U100.A17(DDR2_DQS_B1) U500.A8(U\D\Q\S\/NU)
DDR_DQS_B_2: RN100.8(B1) U100.K20(DDR2_DQS_B2)
DDR_DQS_B_3: RN100.6(B3) U100.N20(DDR2_DQS_B3)
DDR_NCAS: U100.E18(DDR2_CAS_B) U500.L7(C\A\S\)
DDR_NCK: TP504.1(TP) U100.E20(DDR2_CK_B) U500.K8(C\K\)
DDR_NCS: U100.F18(DDR2_CS_B) U500.L8(C\S\)
DDR_NRAS: U100.F19(DDR2_RAS_B) U500.K7(R\A\S\)
DDR_NWE: U100.G19(DDR2_WE_B) U500.K3(W\E\)
DDR_ODT: U100.J17(DDR2_ODT) U500.K9(ODT)
ETH_INT5: TP804.1(TP) U100.U2(PI5/INT5) U801.25(PAD_SPI_INTR)
ETH_RXN: C818.2 R806.1 U801.5(RXIN)
ETH_RXN_RJ45: C818.1 JP800.6(RX-)
ETH_RXP: C819.2 R807.1 U801.4(RXIP)
ETH_RXP_RJ45: C819.1 JP800.3(RX+)
ETH_TXN: C816.2 R804.2 U801.8(TXON)
ETH_TXN_RJ45: C816.1 JP800.2(TX-)
ETH_TXP: C817.2 R803.2 U801.7(TXOP)
ETH_TXP_RJ45: C817.1 JP800.1(TX+)
HP_L: C715.2 JP700.5 R704.2
HP_R: C716.1 JP700.4 R705.2
I2S_CLK: TP513.1(TP) U100.W1(PC3/I2S_CLK) U700.13(BCLK)
I2S_SDI0: TP514.1(TP) U100.R5(PC0/I2S_SDI0) U700.14(ADCDAT)
I2S_SDO0: TP512.1(TP) U100.T4(PC1/I2S_SDO0) U700.16(DACDAT)
I2S_WS: TP515.1(TP) U100.U3(PC2/I2S_WS) U700.15(ADCCLK/GP) U700.17(DACCLK)
LCD_CLK: J600.13 U100.Y5(LCDC_PCLK)
LCD_CONTRAST: J600.11 U100.U7(PF0/LCD_CONTRAST)
LCD_DEN: J600.9 U100.W6(PF1/LCD_DEN)
LCD_HSYNC: J600.5 U100.Y6(PF3/LCD_HSYNC)
LCD_LD0: J600.17 U100.V7(PF5/LCD_LD0)
LCD_LD1: J600.18 U100.W7(PF6/LCD_LD1)
LCD_LD2: J600.19 U100.U8(PF7/LCD_LD2)
LCD_LD3: J600.20 U100.Y7(PF8/LCD_LD3)
LCD_LD4: J600.21 U100.V8(PF9/LCD_LD4)
LCD_LD5: J600.22 U100.W8(PF10/LCD_LD5)
LCD_LD6: J600.23 U100.Y8(PF11/LCD_LD6)
LCD_LD7: J600.24 U100.U9(PF12/LCD_LD7)
LCD_LD8: J600.25 U100.V9(PF13/LCD_LD8)
LCD_LD9: J600.26 U100.W9(PF14/LCD_LD9)
LCD_LD10: J600.27 U100.Y9(PF15/LCD_LD10)
LCD_LD11: J600.28 U100.T7(PF16/LCD_LD11)
LCD_LD12: J600.29 U100.U10(PF17/LCD_LD12)
LCD_LD13: J600.30 U100.V10(PF18/LCD_LD13)
LCD_LD14: J600.31 U100.W10(PF19/LCD_LD14)
LCD_LD15: J600.32 U100.Y10(PF20/LCD_LD15)
LCD_LD16: J600.33 U100.Y11(PF21/LCD_LD16)
LCD_LD17: J600.34 U100.W11(PF22/LCD_LD17)
LCD_LD18: J600.35 U100.V11(PF23/LCD_LD18)
LCD_LD19: J600.36 U100.U11(PF24/LCD_LD19)
LCD_LD20: J600.37 U100.T8(PF25/LCD_LD20)
LCD_LD21: J600.38 U100.T9(PF26/LCD_LD21)
LCD_LD22: J600.39 U100.Y12(PF27/LCD_LD22)
LCD_LD23: J600.40 U100.W12(PF28/LCD_LD23)
LCD_VSYNC: J600.7 U100.V6(PF2/LCD_VSYNC)
LED1: D800.2(CATHODE) JP800.10 U801.14(PAD_LED0)
LED2: D801.2(CATHODE) JP800.12 U801.15(PAD_LED1)
MICBIAS: C709.2 R702.2 U700.1(MICBIAS)
NRESET: R201.1 U100.R19(NRESET) U201.2(R\E\S\E\T\)
PWM0: J600.3 U100.B2(PE4/PWM0/ND_M0)
PWM1: JP600.18 U100.C3(PE5/PWM1/ND_M1)
PZQ: R102.2 U100.D17(PZQ)
RTS4: JP600.11 U100.A8(PD1/URAT4_RTS)
RXD1: TP404.1(TP) U100.A4(PD10/URAT1_RXD) U402.3(TXD)
RXD2: JP600.7 U100.A5(PD8/URAT2_RXD)
RXD3: JP600.6 U100.D7(PD6/URAT3_RXD)
RXD4: JP600.9 U100.B8(PD2/URAT4_RXD)
SCL1: J600.8 U100.V1(PE21/I2C1_CLK)
SCL2: R711.1 U100.T3(PE19/I2C2_CLK) U700.19(SCLK)
SCL3: JP600.16 U100.G4(PE17/I2C3_CLK)
SD1_CD#: JP901.10(CD_SW) R910.1
SD1_CLK: R911.1 U100.A1(PD18/SD1_CLK)
SD1_CMD: JP901.2(CMD) R903.1 U100.C4(PD17/SD1_CMD)
SD1_DATA0: JP901.7(DATA0) R904.1 U100.B4(PD13/SD1_DATA0)
SD1_DATA1: JP901.8(DATA1) R905.1 U100.A3(PD14/SD1_DATA1)
SD1_DATA2: JP901.9(DATA2) R906.1 U100.A2(PD15/SD1_DATA2)
SD1_DATA3: JP901.1(CD/DATA3) R902.1 R907.1 U100.B3(PD16/SD1_DATA3)
SD1_WP: JP901.11(WP) R909.1 U100.C5(PD12/SD1_WP)
SDA1: J600.6 U100.R4(PE20/I2C1_DAT)
SDA2: R709.1 U100.U1(PE18/I2C2_DAT) U700.18(SDA)
SDA3: JP600.14 U100.F4(PE16/I2C3_DAT)
SSI1_CLK: J600.12 U100.F5(PE15/SSI1_CLK)
SSI1_CS: J600.10 U100.E5(PE14/SSI1_CS)
SSI1_RXD: J600.14 U100.E4(PE12/SSI1_RXD)
SSI1_TXD: J600.16 U100.C2(PE13/SSI1_TXD)
SSI2_CLK: TP802.1(TP) U100.C1(PE11/SSI2_CLK) U801.19(PAD_SPI_SCK)
SSI2_CS: TP803.1(TP) U100.D3(PE10/SSI2_CS) U801.20(PAD_SPI_CSN)
SSI2_RXD: TP800.1(TP) U100.D4(PE8/SSI2_RXD) U801.17(PAD_SPI_MISO)
SSI2_TXD: TP801.1(TP) U100.B1(PE9/SSI2_TXD) U801.18(PAD_SPI_MOSI)
T_DDR_A0: U100.G18(DDR2_A0) U500.M8(A0)
T_DDR_A1: U100.H20(DDR2_A1) U500.M3(A1)
T_DDR_A2: U100.J18(DDR2_A2) U500.M7(A2)
T_DDR_A3: U100.A20(DDR2_A3) U500.N2(A3)
T_DDR_A4: U100.F20(DDR2_A4) U500.N8(A4)
T_DDR_A5: U100.B20(DDR2_A5) U500.N3(A5)
T_DDR_A6: U100.J19(DDR2_A6) U500.N7(A6)
T_DDR_A7: U100.D18(DDR2_A7) U500.P2(A7)
T_DDR_A8: U100.H17(DDR2_A8) U500.P8(A8)
T_DDR_A9: U100.F16(DDR2_A9) U500.P3(A9)
T_DDR_A10: U100.B19(DDR2_A10) U500.M2(A10)
T_DDR_A11: U100.H18(DDR2_A11) U500.P7(A11)
T_DDR_A12: U100.C18(DDR2_A12) U500.R2(A12)
T_DDR_A13: U100.H19(DDR2_A13) U500.R8(A13)
T_DDR_A14: U100.G20(DDR2_A14) U500.R3(A14)
T_DDR_DQ0: U100.D12(DDR2_DQ0) U500.G8(DQ0)
T_DDR_DQ1: U100.D13(DDR2_DQ1) U500.G2(DQ1)
T_DDR_DQ2: U100.C13(DDR2_DQ2) U500.H7(DQ2)
T_DDR_DQ3: U100.C14(DDR2_DQ3) U500.H3(DQ3)
T_DDR_DQ4: U100.A15(DDR2_DQ4) U500.H1(DQ4)
T_DDR_DQ5: U100.C12(DDR2_DQ5) U500.H9(DQ5)
T_DDR_DQ6: U100.B14(DDR2_DQ6) U500.F1(DQ6)
T_DDR_DQ7: U100.B13(DDR2_DQ7) U500.F9(DQ7)
T_DDR_DQ8: U100.A16(DDR2_DQ8) U500.C8(DQ8)
T_DDR_DQ9: U100.B17(DDR2_DQ9) U500.C2(DQ9)
T_DDR_DQ10: U100.C16(DDR2_DQ10) U500.D7(DQ10)
T_DDR_DQ11: U100.C17(DDR2_DQ11) U500.D3(DQ11)
T_DDR_DQ12: U100.B18(DDR2_DQ12) U500.D1(DQ12)
T_DDR_DQ13: U100.B15(DDR2_DQ13) U500.D9(DQ13)
T_DDR_DQ14: U100.D16(DDR2_DQ14) U500.B1(DQ14)
T_DDR_DQ15: U100.B16(DDR2_DQ15) U500.B9(DQ15)
TXD1: TP405.1(TP) U100.D6(PD11/URAT1_TXD) U402.4(RXD)
TXD2: JP600.5 U100.B5(PD9/URAT2_TXD)
TXD3: JP600.8 U100.C6(PD7/URAT3_TXD)
TXD4: JP600.10 U100.A6(PD3/URAT4_TXD)
ULPI_D0: U100.V2(ULPI_DATA0) U401.4(DATA0)
ULPI_D1: U100.V3(ULPI_DATA1) U401.5(DATA1)
ULPI_D2: U100.W2(ULPI_DATA2) U401.6(DATA2)
ULPI_D3: U100.Y2(ULPT_DATA3) U401.7(DATA3)
ULPI_D4: U100.W3(ULPI_DATA4) U401.8(DATA4)
ULPI_D5: U100.V4(ULPI_DATA5) U401.10(DATA5)
ULPI_D6: U100.W4(ULPI_DATA6) U401.11(DATA6)
ULPI_D7: TP400.1(TP) U100.Y3(ULPT_DATA7) U401.12(DATA7)
ULPI_DIR: TP403.1(TP) U100.V5(ULPI_DIR) U401.1(DIR)
ULPI_NRST/PI4: TP401.1(TP) U100.Y1(PI4/INT4) U401.22(RESETB)
ULPI_NXT: U100.U6(ULPI_NXT) U401.3(NXT)
ULPI_STP: U100.W5(ULPI_STP) U401.24(STP)
ULPI_XCLK: TP402.1(TP) U100.Y4(ULPT_XCLK) U401.2(CLKOUT)
USB_DM: JP400.2(D-) R407.2
USB_DP: JP400.3(D+) R406.2
N26803328: TP202.1(TP) U100.T2(PF4/LCD_PCLK)
N26809786: R205.2 U100.V16(CSEL)
N26832635: L900.1 U902.3(SW)
N27174352: FB801.2 JP800.8(NC4)
N27174410: D800.1(ANODE) JP800.9 R808.1
N27174420: D801.1(ANODE) JP800.11 R809.1
N27174538: JP800.4(NC1) R805.1
N27176543: R800.2 U801.30(PAD_TEST_EN)
N27176827: C813.1 R810.2 U801.13(PAD_RST_N)
N27176953: R801.2 R802.2 U801.2(RSET_BG)
N27185592: JP401.2(D-) U402.7(USBD-)
N27185613: JP401.3(D+) U402.6(USBD+)
N27185630: C410.2 C416.2 J601.1 JP401.1(VBUS) U402.19(VCC)
N27185780: C411.1 U402.9(XI) Y400.1
N27185788: C412.1 U402.10(XO) Y400.3
N27186179: C409.2 U402.5(V3)
N27191219: C401.1 C402.1 C403.1 C404.1 FB401.1 U401.9(VDDIO) U401.16(VBAT)
N27191223: R403.1 U401.19(RBIAS)
N27191276: R401.1 U401.17(VBUS)
N27191334: R406.1 U401.13(DP)
N27191336: R407.1 U401.14(DM)
N27191358: C405.1 U401.15(VDD3V3)
N27191378: C406.1 U401.23(VDD1V8)
N27191471: R402.1 U401.18(ID)
N27191473: C400.1 R400.1 U401.20(XO) Y401.1
N27191479: C407.1 R400.2 U401.21(REFCLK/XI) Y401.3
N27191717: FB400.2 JP400.4(GND)
N27225679: D900.1(ANODE) R900.2
N27235144: JP800.5(NC2) R812.1
N27238033: C904.1 R901.2 U900.2(VOUT)
N27260459: TP201.1(TP) U100.U15(WAKEUP)
N27261552: TP200.1(TP) U100.P17(RTC_POWERUP)
N27295098: JP901.5(CLK) R911.2
N27352990: C718.1 C719.2 C721.1 JP701.5 R702.1
N27353038: C708.1 U700.36(VMID)
N27353046: C713.1 U700.33(LOUT2_R)
N27353048: C713.2 U700.32(HPIN_R)
N27353052: C714.1 U700.34(LOUT2_L)
N27353054: C714.2 U700.31(HPIN_L)
N27353104: R73.2 U700.8(MODE/GP)
N27353114: R72.1 U700.20(CSB/GP)
N27353126: C712.2 U700.23(CPC1)
N27353148: C711.2 U700.27(HPVN)
N27353444: C721.2 U700.3(IN1_R)
N27353446: C717.1 C718.2 C720.1 JP701.4 R707.2
N27359386: C720.2 U700.2(IN1_L)
N27361900: C710.2 U700.24(HPVP)
N27363539: R704.1 U700.29(HPOUT_L)
N27363542: R705.1 U700.28(HPOUT_R)
N27374807: C204.1 R207.2 Y201.1
N27377639: C712.1 U700.26(CPC2)
N27384058: F900.1 SW900.1(NC)
N27385922: C820.2 R805.2 R812.2
N27407695: D400.1(ANODE) L400.2 U400.5(EXT)
N27409190: R408.2 U400.1(CE)
N27413990: C716.2 R706.1
N273624561: C715.1 R703.2

Pads without a net: FD503 1; FD700 1; FD701 1; FD702 1; JP401 4; JP700 2 3; JP701 2 3; JP800 7 15 16; NOREF 1; NOREF#2 1; SW900 3; U100 A7 A9 A10 A11 A12 A19 B6 B7 B9 B10 B11 C7 C8 C9 C10 C11 D1 D2 D8 D10 D11 E1 E2 E3 F1 F2 F3 F17 G1 G2 G3 H1 H2 H3 H4 J1 J2 J3 J4 J20 K1 K2 K3 K4 K17 K18 K19 L1 L2 L3 L4 L16 L17 L18 L19 M1 M2 M3 M4 M15 M16 M17 M19 M20 N1 N2 N3 N4 N16 N17 N18 N19 P1 P2 P3 P4 P18 P19 R1 R2 R3 R12 R13 R20 T1 T5 T12 T14 U4 U5 U12 U14 V15 W16 Y16; U400 3; U402 1 2 11 12 13 14 15 16 17 18 20; U500 A2 E2 R7; U700 4 5 6 7 11 38 39 40; U801 10 11 12 16 28 29 31

## Via types
v1: diameter 0.41, hole 0.2, TOP to BOTTOM, 407 vias
v2: diameter 0.51, hole 0.25, TOP to BOTTOM, 384 vias

## Routing (per net, layer and track width the routed paths; a pad name or vN(x,y) marks a point on that pad's centre or on a via; arc(x,y) is an arc through that point)
GND: length 531.2
  TOP w0.127: 51.49,13.49 v2(51.49,13.44) ; 53.6,15.34 v2(53.71,15.34) ; 53.76,13.54 v2(53.76,13.42) ; U500.J7 8.85,12.62 v1(8.85,12.69) ; U500.N1 v1(6.41,16.65) ; U801.33 v2(52.54,14.38)
  TOP w0.203: v2(51.3,29.4) 51.3,29.43 50.73,29.99 U700.10 ; U700.25 52.34,26.65 v2(52.03,26.95)
  TOP w0.254: Y400.2 9.99,30.86 ; Y400.2 10.87,31.64 ; Y400.2 9.18,31.64 v2(8.94,31.88) ; U500.H8 10.03,11.42 9.65,11.04 v1(9.63,11.04) ; U100.G11 28.77,24.13 v1(29.16,24.52) 29.17,24.52 29.56,24.13 U100.G10 ; 28.78,24.93 v1(29.18,25.33) U100.H10 ; 28.78,24.93 U100.H11 ; 28.78,24.93 28.38,25.33 ; U100.N15 v1(25.97,29.34) 25.96,29.34 25.57,29.73 U100.P15 ; U500.D8 v1(13.63,11.04) ; U100.P7 v1(32.37,30.13) ; U500.H2 10.03,16.24 v1(10.45,16.65) ; U500.D2 13.58,15.89 13.58,15.89 v1(13.61,15.86) ; v1(15.24,12.65) 15.24,12.63 U500.A7 ; U100.G7 32.36,24.53 v1(32.36,24.54) 31.97,24.93 U100.H7 31.97,24.93 ; U100.G9 30.37,24.13 v1(30.77,24.53) U100.G8 ; U100.L10 29.57,27.33 v1(29.17,27.73) U100.L11 v1(28.37,27.73) U100.L12 ; U100.L7 31.97,27.34 31.6,27.71 v1(31.6,27.72) 31.6,27.76 U100.M7 ; v1(8.91,15.01) 9.23,15.33 U500.J3 ; U100.U16 v1(24.37,32.53) ; U100.J12 v1(27.57,25.33) 27.97,24.93 U100.H12 ; U500.P9 v1(4.84,10.25) ; 52.29,14 U801.33 54.29,16 U801.9 ; 52.29,14 U801.21 ; 52.29,14 51.29,13 U801.26 ; U500.B2 v1(15.23,16.64) ; U100.T17 23.97,31.32 v1(24.37,30.92) ; U100.U19 v1(21.97,32.53) ; U100.K12 27.97,26.5 v1(28.36,26.11) 28.77,26.52 U100.K11 v1(29.17,26.93) 29.57,26.53 U100.K10 ; v1(28.37,25.33) U100.J11 v1(29.17,26.13) U100.J10 29.56,25.73 ; U100.P12 v1(27.57,30.13) U100.P13 ; v1(24.37,30.92) U100.R17 ; v1(24.37,30.92) U100.R16 ; v1(24.37,30.92) 24.77,31.32 U100.T16 ; U100.N12 v1(27.57,29.33) ; 65.36,45.99 C415.1 ; 27.17,28.13 U100.M13 v1(27.56,28.52) 27.17,28.92 U100.N13 ; U100.P10 v1(29.17,29.33) 28.77,29.73 U100.P11 ; U100.M8 v1(30.77,28.53) U100.M9 ; v2(45.09,25.51) 45.1,25.53 R72.2 45.82,25.53 ; v1(11.92,12.69) 11.94,12.67 11.99,12.67 U500.E7 ; U100.W19 v1(22.77,33.33) 22.38,32.93 U100.V19 ; v1(27.57,24.54) 27.57,24.54 27.97,24.14 U100.G12 ; v1(27.57,24.54) 27.17,24.93 U100.H13 ; v1(27.57,24.54) U100.G13 ; C803.1 48.16,14.76 47.76,15.15 ; C805.1 57.54,15.56 C810.1 ; U100.H8 v1(30.77,25.33) 30.37,24.93 U100.H9 ; v2(38.66,1.45) 38.65,1.45 ; D900.2 v2(18.12,49.41) ; U100.W13 27.17,33.72 26.81,33.36 v1(26.81,33.36) ; U100.L9 v1(30.77,27.73) U100.L8 ; U500.B8 v1(15.23,11.04) ; U100.H14 26.36,24.93 v1(25.96,24.54) 25.96,24.54 U100.G14 26.37,24.13 ; 51.32,29.4 v2(51.3,29.4) ; U100.K9 30.37,26.53 v1(30.77,26.93) U100.K8 ; U100.N11 28.77,28.93 v1(29.17,28.53) U100.N10 ; U100.M11 v1(28.37,28.53) U100.M12 ; U100.W15 25.17,34.13 v1(25.16,34.13) ; U100.Y20 v1(21.17,34.93) ; 51.59,33.46 R73.1 v2(51.59,34.11) ; U100.J8 v1(30.77,26.13) U100.J9 ; 57.84,21.52 U800.1 ; U100.M10 v1(29.97,28.53) ; v1(12.03,16.64) 11.63,16.24 U500.F2 ; U100.V17 v1(23.57,33.33) ; 54.07,22.09 v2(54.04,22.06) ; U100.P8 31.15,29.73 v1(30.76,30.12) 30.37,29.73 U100.P9 ; U100.K14 v1(25.97,26.13) U100.J14 ; U500.A3 v1(16.03,15.84) ; U100.L14 v1(25.98,27.73) 26.37,28.12 U100.M14 ; U100.J7 v1(32.37,25.33) 32.77,24.93 U100.H6 ; U500.E3 v1(12.04,15.06) ; U500.F8 v1(12.03,11.04)
  TOP w0.381: 32.19,3.75 JP600.20 ; JP600.20 33.07,4.63 ; JP600.20 32.19,5.51 ; JP600.20 31.31,4.63 ; C809.2 60.55,18.29 ; C809.2 60.55,16.13 ; C809.2 61.53,17.21 ; C809.2 59.57,17.21 ; 62.39,47.25 C408.2 ; C408.2 63.48,46.27 ; C408.2 64.56,47.25 ; C408.2 63.48,48.23 ; 19.58,45.59 Y201.3 ; Y201.3 21.03,42.84 ; Y201.3 22.48,45.59 ; Y201.3 21.03,48.35 ; 0.82,39.31 JP401.NC4 ; JP401.NC4 3.09,39.31 ; JP401.NC4 1.96,38.18 ; JP401.NC4 1.96,40.44 ; 49.77,42.76 C407.2 ; C407.2 50.19,42.28 ; C407.2 50.19,43.24 ; 50.11,20.95 C813.2 ; C813.2 50.79,20.22 ; C813.2 51.47,20.95 ; C813.2 50.79,21.68 ; 58.54,50.9 J600.2 ; J600.2 57.66,51.78 ; J600.2 58.54,52.66 ; J600.2 59.42,51.78 ; 7.02,35.72 C411.2 ; C411.2 7.44,36.21 ; C411.2 7.44,35.24 ; R802.1 60.12,12.52 ; R802.1 59.69,12.04 ; R802.1 59.69,13 ; JP600.19 32.19,3.51 ; JP600.19 32.19,1.75 ; JP600.19 31.31,2.63 ; JP600.19 33.07,2.63 ; 53.32,19.71 C808.1 53.8,20.14 ; 46.8,15.15 C815.2 ; C815.2 47.28,15.58 ; C815.2 47.76,15.15 ; JP401.9 1.98,35.29 ; JP401.9 1.98,33.73 ; JP401.9 1.05,34.51 ; JP401.9 2.91,34.51 ; C410.1 18.48,44.46 ; C410.1 18,44.03 ; C410.1 18.96,44.03 ; 50.07,5.69 C914.2 ; C914.2 50.8,6.37 ; C914.2 51.53,5.69 ; C914.2 50.8,5.01 ; 5.06,36.43 JP401.5 ; JP401.5 6.31,36.81 ; JP401.5 3.8,36.81 ; 51.3,9.24 C807.1 ; C807.1 51.78,8.81 ; C807.1 52.26,9.24 ; 7.31,42.09 C409.1 ; C409.1 8.27,42.09 ; C409.1 7.79,42.51 ; Y401.2 51.1,47.66 ; Y401.2 51.98,46.88 ; Y401.2 50.22,46.88 ; 31.01,42.06 C200.2 ; C200.2 31.01,43.02 ; C200.2 31.44,42.54 ; 1.05,41.71 JP401.8 ; JP401.8 2.91,41.71 ; JP401.8 1.98,42.49 ; JP401.8 1.98,40.93 ; 37.18,2.24 R902.2 ; R902.2 38.54,2.24 ; R902.2 37.86,2.97 ; 17.99,41.64 C204.2 ; C204.2 18.47,42.07 ; C204.2 18.95,41.64 ; 61.13,19.36 C800.1 ; C800.1 61.81,18.62 ; C800.1 62.49,19.36 ; 57.95,13.53 C802.1 57.53,14.01 ; 57.96,14.56 C805.1 57.54,14.08 ; C203.2 23.99,41.64 ; C203.2 23.03,41.64 ; C203.2 23.51,42.07 ; D900.2 19.1,48.33 ; D900.2 18.12,47.45 ; D900.2 17.14,48.33 ; 5.01,54.5 JP900.2 ; JP900.2 6.39,55.43 ; JP900.2 3.63,55.43 ; 57.66,53.78 J600.1 ; J600.1 59.42,53.78 ; J600.1 58.54,52.9 ; J600.1 58.54,54.66 ; 1.96,35.78 JP401.NC3 ; JP401.NC3 1.96,38.04 ; JP401.NC3 0.82,36.91 ; JP401.NC3 3.09,36.91 ; C801.2 57.06,8.81 ; C801.2 57.06,6.84 ; C801.2 55.98,7.82 ; Y200.2 27.1,47.33 ; Y200.2 27.98,46.55 ; Y200.2 26.22,46.55 ; Y401.4 54.18,45.28 ; Y401.4 52.42,45.28 ; Y401.4 53.3,44.49 ; JP401.7 5.49,34.81 ; JP401.7 4.56,34.03 ; JP401.7 3.62,34.81 ; JP401.7 4.56,35.59 ; C412.2 10.53,36.21 ; C412.2 10.96,35.72 ; C412.2 10.53,35.24 ; 28.42,44.95 Y200.4 29.3,44.16 ; 58.75,21.52 U800.1 57.87,22.2 ; 54.29,11.34 U801.32 54.6,11.85 ; 1.88,54.5 JP900.4 3.26,55.43 ; 10.6,39.18 U402.8 8.58,39.18 ; 52.82,9.26 R800.1 ; R800.1 53.78,9.26 ; R800.1 53.3,8.83 ; JP900.3 5.01,52.11 ; JP900.3 5.01,50.25 ; JP900.3 6.39,51.18 ; JP900.3 3.63,51.18 ; 55.62,21.11 C804.2 ; C804.2 54.54,22.09 ; C804.2 56.7,22.09 ; Y800.4 42.42,12.25 ; Y800.4 42.42,10.49 ; Y800.4 41.64,11.37 ; C201.2 25.75,43.02 ; C201.2 25.33,42.54 ; C201.2 25.75,42.06 ; 47.28,9.72 C814.2 ; C814.2 46.8,10.15 ; C814.2 47.76,10.15 ; 3.62,41.41 JP401.6 ; JP401.6 5.49,41.41 ; JP401.6 4.56,42.19 ; R801.1 60.12,13.53 ; R801.1 59.69,14.01 ; R801.1 59.69,13.05 ; C400.2 55.43,42.75 ; C400.2 55,42.27 ; C400.2 55,43.23 ; 14.48,53.82 C902.2 12.12,53.82 ; 57.96,12.45 C806.1 57.54,11.97 ; Y400.4 8.67,33.24 ; Y400.4 6.91,33.24 ; Y400.4 7.79,34.02 ; 44.02,12.69 Y800.2 44.8,13.57 ; C915.1 50.52,7.04 ; C915.1 50.09,6.55 ; C915.1 50.09,7.52 ; 52.07,33.47 R73.1 51.11,33.47 ; 3.36,51.18 JP900.5 1.98,52.11
  GND w0.381: 31.31,4.63 JP600.20 ; JP600.20 32.19,5.51 ; JP600.20 33.07,4.63 ; JP600.20 32.19,3.75 ; JP401.6 4.56,42.19 ; JP401.6 3.62,41.41 ; JP401.6 4.56,40.63 ; JP401.6 5.49,41.41 ; J600.2 58.54,52.66 ; J600.2 57.66,51.78 ; J600.2 59.42,51.78 ; J600.2 58.54,50.9 ; 32.19,1.75 JP600.19 ; JP600.19 32.19,3.51 ; JP600.19 33.07,2.63 ; JP600.19 31.31,2.63 ; 5.01,50.25 JP900.3 ; JP900.3 5.01,52.11 ; JP900.3 6.39,51.18 ; JP900.3 3.63,51.18 ; 1.05,41.71 JP401.8 ; JP401.8 1.98,40.93 ; JP401.8 1.98,42.49 ; JP401.8 2.91,41.71 ; 1.98,33.73 JP401.9 ; JP401.9 2.91,34.51 ; JP401.9 1.05,34.51 ; JP401.9 1.98,35.29 ; 3.63,55.43 JP900.2 ; JP900.2 6.39,55.43 ; JP900.2 5.01,54.5 ; JP401.7 4.56,35.59 ; JP401.7 5.49,34.81 ; JP401.7 3.62,34.81 ; JP401.7 4.56,34.03 ; 57.66,53.78 J600.1 ; J600.1 58.54,54.66 ; J600.1 58.54,52.9 ; J600.1 59.42,53.78 ; 3.26,55.43 JP900.4 1.88,54.5 ; 3.36,51.18 JP900.5 1.98,52.11
  GND1 w0.381: JP600.19 33.07,2.63 ; JP600.19 32.19,3.51 ; JP600.19 32.19,1.75 ; JP600.19 31.31,2.63 ; JP401.9 1.98,35.29 ; JP401.9 2.91,34.51 ; JP401.9 1.05,34.51 ; JP401.9 1.98,33.73 ; 4.56,40.63 JP401.6 ; JP401.6 5.49,41.41 ; JP401.6 3.62,41.41 ; JP401.6 4.56,42.19 ; 3.36,51.18 JP900.5 1.98,52.11 ; 3.26,55.43 JP900.4 1.88,54.5 ; 5.01,50.25 JP900.3 ; JP900.3 3.63,51.18 ; JP900.3 5.01,52.11 ; JP900.3 6.39,51.18 ; 1.05,41.71 JP401.8 ; JP401.8 1.98,40.93 ; JP401.8 1.98,42.49 ; JP401.8 2.91,41.71 ; 58.54,52.9 J600.1 ; J600.1 57.66,53.78 ; J600.1 58.54,54.66 ; J600.1 59.42,53.78 ; 58.54,50.9 J600.2 ; J600.2 59.42,51.78 ; J600.2 57.66,51.78 ; J600.2 58.54,52.66 ; 31.31,4.63 JP600.20 ; JP600.20 33.07,4.63 ; JP600.20 32.19,3.75 ; JP600.20 32.19,5.51 ; 3.63,55.43 JP900.2 ; JP900.2 6.39,55.43 ; JP900.2 5.01,54.5 ; JP401.7 4.56,35.59 ; JP401.7 5.49,34.81 ; JP401.7 4.56,34.03 ; JP401.7 3.62,34.81
  BOTTOM w0.127: C327.1 v1(31.58,25.32)
  BOTTOM w0.254: C404.2 57.72,40.72 ; v1(23.57,22.93) 23.57,23.65 C322.1 ; v2(9.16,28.99) 8.8,28.63 8.8,27.81 ; C908.1 v2(11.77,37.13) ; C312.1 34.1,30.26 v1(33.97,30.14) 33.7,30.41 C315.1 33.13,30.41 ; 31.65,30.13 C329.1 ; C416.1 v2(5.06,36.06) ; C511.2 8.76,15.16 v1(8.91,15.01) ; v1(25.97,29.34) 25.61,29.69 25.61,29.84 25.38,30.07 C335.1 ; 8.8,27.81 8.8,27.81 8.85,27.75 ; 8.8,27.81 R201.2 ; C318.1 35.56,26.1 v1(35.57,26.11) ; C306.1 26.85,23.72 26.85,23.81 v1(27.57,24.54) ; v1(24.37,30.92) 25.07,31.63 C333.2 ; 48.63,30.62 48.64,30.63 C704.2 ; v2(51.59,34.11) 51.23,33.75 50.59,33.75 C700.1 ; C314.2 v2(38.15,24.97) ; v1(27.57,25.33) 27.13,24.9 C301.1 ; C320.1 33.26,23.72 v1(33.97,23.72) 34.63,23.72 C311.1 ; v1(25.96,24.54) 25.21,23.78 C101.2 ; RN100.1 RN100.2 RN100.3 RN100.4 ; 25.18,25.87 C303.1 ; C326.1 v1(29.97,25.33)
  BOTTOM w0.381: 30.21,18.28 C502.2 ; C502.2 29.13,19.26 ; C502.2 31.29,19.26 ; C502.2 30.21,20.24 ; 29.51,29.13 C313.1 29.99,28.7 ; 23.58,28.37 C319.1 24.06,27.95 ; C910.2 26.96,13 ; C910.2 25.88,12.02 ; C910.2 28.04,12.02 ; C910.2 26.96,11.04 ; C503.2 11.48,8.64 ; C503.2 10.52,8.64 ; C503.2 11,8.22 ; 31.11,30.08 C329.1 32.07,30.08 ; 58.54,50.9 J600.2 ; J600.2 59.42,51.78 ; J600.2 58.54,52.66 ; J600.2 57.66,51.78 ; 32.66,25.11 C330.1 33.62,25.11 ; 34.83,26.83 C318.1 34.83,25.37 ; 60.38,48.5 FB400.1 59.65,47.82 ; 58.04,38.26 C405.2 ; C405.2 58.77,38.94 ; C405.2 57.31,38.94 ; C405.2 58.04,39.62 ; 32.65,30.41 C315.1 33.13,30.84 ; JP600.20 33.07,4.63 ; JP600.20 32.19,5.51 ; JP600.20 32.19,3.75 ; JP600.20 31.31,4.63 ; 13.04,53.95 ZD900.1 ; ZD900.1 14.59,52.69 ; ZD900.1 14.59,55.21 ; ZD900.1 16.14,53.95 ; C328.1 28.84,29.13 ; C328.1 27.87,29.13 ; C328.1 28.36,28.7 ; C403.2 58.04,42.16 ; C403.2 58.77,41.48 ; C403.2 57.31,41.48 ; C403.2 58.04,40.8 ; 24.81,10.5 C911.1 ; C911.1 25.29,10.93 ; C911.1 25.77,10.5 ; 5.4,26.42 U201.1 ; U201.1 6.76,26.42 ; U201.1 6.08,25.54 ; 8.65,38.85 U900.1 ; U900.1 9.73,39.48 ; U900.1 8.65,40.11 ; 2.24,27.31 C202.2 ; C202.2 2.72,27.74 ; C202.2 1.76,27.74 ; 12.81,15.49 C510.2 13.29,15.92 ; 31.1,24.82 C327.1 32.06,24.82 ; JP901.6 53.62,18.72 ; JP901.6 52.36,18.72 ; JP901.6 52.99,17.29 ; 28.86,31.65 C332.1 28.38,31.22 ; 26.32,27.92 C302.1 ; C302.1 27.28,27.92 ; C302.1 26.8,28.35 ; 1.88,54.5 JP900.4 3.26,55.43 ; 48.81,28.09 C701.1 ; C701.1 49.77,28.09 ; C701.1 49.29,27.67 ; C100.2 1.53,20.97 ; C100.2 1.53,19.51 ; C100.2 0.84,20.24 ; C100.2 2.21,20.24 ; 53.21,43.71 R403.2 ; R403.2 53.69,44.14 ; R403.2 54.17,43.71 ; JP900.3 5.01,52.11 ; JP900.3 6.39,51.18 ; JP900.3 5.01,50.25 ; JP900.3 3.63,51.18 ; C912.1 19.22,34.52 ; C912.1 18.74,34.1 ; C912.1 19.7,34.1 ; 51.05,44.74 C406.2 ; C406.2 52.41,44.74 ; C406.2 51.73,44.01 ; C406.2 51.73,45.47 ; C336.2 38.71,27.01 ; C336.2 38.71,25.55 ; C336.2 39.39,26.28 ; C336.2 38.03,26.28 ; 6.38,8.64 C501.2 6.86,8.22 ; 1.05,34.51 JP401.9 ; JP401.9 1.98,35.29 ; JP401.9 2.91,34.51 ; JP401.9 1.98,33.73 ; J600.1 58.54,54.66 ; J600.1 58.54,52.9 ; J600.1 59.42,53.78 ; J600.1 57.66,53.78 ; 3.63,55.43 JP900.2 ; JP900.2 5.01,54.5 ; JP900.2 6.39,55.43 ; 7.3,46.92 C901.1 6.88,46.44 ; 27.9,21.77 C321.1 ; C321.1 28.86,21.77 ; C321.1 28.38,21.35 ; 3.62,34.81 JP401.7 ; JP401.7 4.56,35.59 ; JP401.7 5.49,34.81 ; 20.01,30.91 C337.1 ; C337.1 20.49,30.48 ; C337.1 20.97,30.91 ; 7.11,34.92 C907.2 ; C907.2 6.13,36 ; C907.2 8.09,36 ; C907.2 7.11,37.09 ; 76.96,12.33 C820.1 77.38,12.81 ; 27.92,24.82 C305.1 ; C305.1 28.88,24.82 ; C305.1 28.4,25.25 ; 48.33,35.07 C401.2 ; C401.2 49.06,35.75 ; C401.2 48.33,36.43 ; C401.2 47.59,35.75 ; C104.2 26.6,17.49 ; C104.2 25.92,18.22 ; C104.2 25.24,17.49 ; 14.45,15.51 C507.2 13.97,15.93 ; 62.6,5.26 C811.2 ; C811.2 63.08,4.83 ; C811.2 63.56,5.26 ; 4.56,40.63 JP401.6 ; JP401.6 5.49,41.41 ; JP401.6 4.56,42.19 ; JP401.6 3.62,41.41 ; 54.89,37.01 C413.2 53.91,35.93 ; C812.1 63.08,16.73 ; C812.1 63.56,16.31 ; C812.1 62.6,16.31 ; C309.1 14.15,28.98 ; C309.1 13.47,28.25 ; C309.1 14.15,27.51 ; C309.1 14.83,28.25 ; JP901.15 35.97,17.61 ; JP901.15 36.9,16.18 ; JP901.15 35.97,14.75 ; JP901.15 35.04,16.18 ; R205.1 22.56,38.08 ; R205.1 23.04,37.65 ; R205.1 22.08,37.65 ; 5.83,8.22 C505.2 ; C505.2 6.31,8.64 ; C505.2 5.34,8.64 ; 50.96,33.81 C700.1 50.53,34.29 ; U400.4 64.96,39.26 ; U400.4 64.55,38.42 ; U400.4 65.37,38.42 ; U400.4 64.96,37.59 ; 20.49,34.51 C316.2 20.01,34.08 ; 16.2,7.96 C508.2 ; C508.2 15.47,8.64 ; C508.2 16.2,9.32 ; C508.2 16.94,8.64 ; R203.1 23.62,38.09 ; R203.1 23.14,37.66 ; R203.1 24.1,37.66 ; 26.8,24.47 C301.1 26.32,24.9 ; 44.89,18.72 JP901.3 ; JP901.3 46.15,18.72 ; JP901.3 45.52,17.29 ; JP600.19 32.19,3.51 ; JP600.19 32.19,1.75 ; JP600.19 31.31,2.63 ; 21.5,30.9 C317.2 21.98,30.48 ; 8.86,10.55 C500.2 9.28,11.03 ; C906.1 2.74,32.41 ; C906.1 1.38,32.41 ; C906.1 2.06,33.14 ; C906.1 2.06,31.68 ; C304.1 25.68,27.95 ; C304.1 24.72,27.95 ; C304.1 25.2,28.38 ; 16.68,15.52 C509.2 ; C509.2 17.16,15.95 ; C509.2 16.2,15.95 ; 60.01,1.62 JP901.13 ; JP901.13 61.87,1.62 ; JP901.13 60.94,3.05 ; 16.69,51.97 C900.1 ; C900.1 17.17,52.39 ; C900.1 17.65,51.97 ; 19.34,46.75 C904.2 ; C904.2 21.5,46.75 ; C904.2 20.42,45.77 ; C904.2 20.42,47.73 ; JP901.12 61.04,17.61 ; JP901.12 61.04,14.75 ; JP901.12 61.97,16.18 ; 23.78,18.84 R102.1 ; R102.1 24.74,18.84 ; R102.1 24.26,18.41 ; C402.2 53.62,35.76 ; C402.2 53.2,35.27 ; C402.2 53.2,36.24 ; 24.16,37.66 R204.2 24.64,38.09 ; 18.03,28.22 RN100.1 18.51,27.85 ; 1.53,14.5 C300.2 1.53,12.53 ; C512.2 12.5,14.45 ; C512.2 12.08,13.97 ; C512.2 12.08,14.93 ; C325.2 18.56,34.77 ; C325.2 17.88,34.04 ; C325.2 17.88,35.5 ; C325.2 17.2,34.77 ; C416.1 5.06,38.07 ; C416.1 5.74,37.34 ; C416.1 4.37,37.34 ; FB801.1 67.16,3.78 ; FB801.1 66.08,2.8 ; FB801.1 65,3.78 ; FB801.1 66.08,4.76 ; 3.36,51.18 JP900.5 1.98,52.11 ; JP401.8 2.91,41.71 ; JP401.8 1.98,40.93 ; JP401.8 1.05,41.71 ; JP401.8 1.98,42.49 ; C903.2 14.46,46.86 ; C903.2 13.48,45.78 ; C903.2 12.5,46.86 ; 22.46,33.13 C324.2 21.98,32.71 ; 7.4,31.63 U902.2 5.74,31.63 ; 26.29,29.14 C323.2 ; C323.2 27.25,29.14 ; C323.2 26.77,28.71 ; 23.1,29.15 C308.2 23.58,28.73 ; C909.2 16.98,35.99 ; C909.2 15.9,35.01 ; C909.2 15.9,36.98 ; 22.43,28.68 C102.2 21.95,29.11 ; 32.63,28.3 C331.1 33.11,28.73 ; 16.03,28.24 C334.2 ; C334.2 16.71,28.97 ; C334.2 16.71,27.51 ; C334.2 17.39,28.24 ; 29.49,24.83 C326.1 30.45,24.83 ; 24.7,25.86 C303.1 25.66,25.86 ; 32.87,13.18 C905.1 32.14,13.86 ; 21.12,23.1 C103.2 ; C103.2 20.69,23.58 ; C103.2 21.12,24.06 ; 9.47,8.64 C504.2 ; C504.2 9.95,8.22 ; C504.2 10.43,8.64 ; 31.39,8.22 U901.1 32.07,9.1 ; 49.98,25.19 C705.2 ; C705.2 49.98,26.15 ; C705.2 49.55,25.67 ; 31.59,21.37 C310.1 31.11,21.79 ; 8.92,8.2 R501.1 9.4,8.63 ; R402.2 55.2,43.7 ; R402.2 54.24,43.7 ; R402.2 54.72,44.13 ; 26.96,17.15 R101.1 27.44,16.73 ; 12.88,8.22 C506.2 ; C506.2 13.36,8.64 ; C506.2 12.4,8.64 ; JP901.14 33.99,3.05 ; JP901.14 33.06,1.62 ; JP901.14 34.92,1.62 ; 23.59,30.81 C307.2 24.07,31.23 ; C414.2 65.42,47.94 ; C414.2 64.1,46.81 ; C414.2 64.1,49.07 ; C414.2 62.78,47.94
  BOTTOM w0.508: v2(59.65,49.39) FB400.1 v2(58.72,48.5) ; v2(52.03,26.95) 52.95,27.86 FB702.2
  vias: v1(33.97,26.91) v1(35.56,29.32) v1(35.56,25.31) v2(0.81,54.14) v2(0.83,44.22) v2(0.8,40.77) v2(0.98,47.35) v2(0.92,35.33) v2(0.89,10.72) v2(1.13,6.69) v2(1.17,1) v2(1.87,24.21) v2(1.91,21.69) v2(2.27,26.56) v2(2.25,12.09) v2(2.6,7.99) v2(3.7,27.76) v2(3.89,10.46) v2(4.71,6.69) v2(5.23,53.31) v2(5.89,44.02) v2(6.24,1.17) v2(6.4,44.75) v2(6.52,40.28) v2(6.95,41.88) v2(6.9,7.62) v2(7.05,55.47) v2(6.99,29.36) v2(7.07,4.85) v2(9.86,7.72) v2(10.77,6.01) v2(10.99,29.48) v2(11.15,40.8) v2(11.35,38.34) v2(11.9,1.03) v2(12.38,3.63) v2(13.06,7.72) v2(14.01,6.03) v2(15.08,1) v2(15.38,55.59) v2(15.67,45.95) v2(15.71,47.1) v2(16.99,7.72) v2(17.16,55.18) v2(17.6,6.08) v2(18.26,37.73) v2(18.5,30.81) v2(18.67,52.76) v2(18.86,55.32) v2(18.97,0.91) v2(19.25,34.94) v2(19.34,50.36) v2(20.41,37.71) v2(20.5,7.72) v2(21.96,7.25) v2(22.65,44.16) v2(22.99,50.42) v2(23.11,38.23) v2(23.46,42.38) v2(23.56,0.91) v2(24.31,55.28) v2(24.52,43.36) v2(25.32,40.09) v2(26.01,50.38) v2(26.34,10.59) v2(27.8,0.88) v2(28.35,55.18) v2(28.47,13) v2(28.61,15.16) v2(29.06,50.41) v2(29.39,17.88) v2(30.02,41.53) v2(30.02,39.88) v2(32.06,50.33) v2(32.03,42.7) v2(32.03,39.88) v2(32.26,0.93) v2(32.58,55.26) v2(33.12,9.47) v2(33.11,7.31) v2(34.23,41.91) v2(34.38,47.64) v2(34.3,43.93) v2(34.46,50.06) v2(36.01,6.36) v2(36.15,14) v2(36.11,9.41) v2(36.32,12.09) v2(36.68,55.36) v2(37.02,44.18) v2(37.78,5.28) v2(38.02,47.42) v2(38.02,8.34) v2(38.11,13.23) v2(38.09,11.11) v2(39.61,17.11) v2(39.89,11.39) v2(39.93,8.58) v2(39.98,14.5) v2(40.08,5.44) v2(40.41,0.96) v2(41.58,8.36) v2(41.73,19.33) v2(41.86,27.77) v2(41.83,16.36) v2(42.17,25.55) v2(42.11,5.96) v2(42.22,42.2) v2(42.24,29.72) v2(42.41,55.37) v2(42.47,3.14) v2(43.69,30.67) v2(43.75,25.73) v2(43.94,42.23) v2(43.94,34.37) v2(43.89,28.05) v2(44.1,45.25) v2(44.24,1.1) v2(45.1,29.21) v2(45.7,9.92) v2(45.81,6.86) v2(45.84,3.76) v2(46.04,16.36) v2(46.04,15.19) v2(46,12.94) v2(46.14,33.44) v2(46.37,55.33) v2(46.99,19.77) v2(47.22,24.55) v2(47.55,33.02) v2(47.54,5.32) v2(47.82,7.9) v2(47.88,1.35) v2(48.53,22.24) v2(49.51,50.65) v2(49.56,43.28) v2(49.76,10.1) v2(49.85,24.18) v2(49.99,55.31) v2(50.14,43.74) v2(51.27,28.44) v2(51.27,27.37) v2(51.51,15.4) v2(51.5,14.4) v2(51.72,39.88) v2(51.74,38.37) v2(51.8,1.03) v2(52.06,28.94) v2(52.01,7.66) v2(52.12,22.16) v2(52.49,39.19) v2(52.54,15.39) v2(52.58,13.44) v2(52.78,34.26) v2(52.85,5.3) v2(53.15,38.56) v2(53.26,39.97) v2(53.39,50.69) v2(53.6,55.45) v2(53.72,14.4) v2(54.36,48.4) v2(54.41,7.73) v2(54.97,1.52) v2(55.03,10.2) v2(55.58,37.42) v2(56.97,55.41) v2(57.07,0.96) v2(57.14,44.03) v2(57.11,2.25) v2(57.56,49.9) v2(57.72,40.21) v2(58.4,6.41) v2(58.51,9.3) v2(58.66,44.54) v2(59.13,1.52) v2(59.27,42.87) v2(59.75,37.48) v2(60.29,4.99) v2(60.61,19.13) v2(60.68,55.52) v2(60.76,50.1) v2(60.76,11.96) v2(61.24,14.36) v2(61.37,8.46) v2(61.3,5.94) v2(61.94,46.66) v2(61.98,3.66) v2(62.14,40.8) v2(62.1,17.26) v2(62.24,37.46) v2(62.46,0.91) v2(62.6,42.56) v2(63.02,2.06) v2(63.44,19.57) v2(63.63,4.18) v2(63.96,14.36) v2(64.16,11.1) v2(64.5,1.57) v2(64.83,18) v2(65.6,42.66) v2(65.72,50.96) v2(65.74,37.48) v2(65.83,41.33) v2(66.17,46.22) v2(66.28,48.64) v2(66.47,19.52) v2(67.01,55.21) v2(67.08,11.04) v2(67.29,42.66) v2(67.39,7.98) v2(67.57,1.38) v2(67.67,13.98) v2(68,40.41) v2(68.87,46.44) v2(68.94,49.9) v2(69.56,37.59) v2(69.77,19.62) v2(70.51,43.17) v2(70.63,1.55) v2(70.73,6.59) v2(70.79,16.45) v2(71.03,46.1) v2(71.07,3.57) v2(71.63,9.26) v2(71.95,48.82) v2(72.01,12.84) v2(72.16,17.92) v2(72.24,39.61) v2(72.58,19.86) v2(72.91,55.28) v2(73.05,53.05) v2(73.45,42.99) v2(74.42,37.59) v2(74.96,15.96) v2(74.93,5.19) v2(74.99,45.76) v2(75.21,41.66) v2(76.1,0.93) v2(76.23,19.8) v2(76.53,55.07) v2(76.75,39.65) v2(77.5,47.5) v2(77.78,42.7) v2(77.8,14.12) v2(79.71,37.53) v2(79.86,49.5) v2(80,54.93) v2(80.14,44.37) v2(80.1,7.07) v2(80.1,1.03) v2(80.32,39.56) v2(80.29,19.7) v2(80.48,16.03) v2(80.54,12.08)
